# Altium PCB PCB.PcbDoc
Units mm, origin at the board's own origin, x right, y up, seen from the top; angles counter-clockwise.
Board outline 150 x 150 mm, 4 copper layers (Top Layer, Layer 1, Layer 2, Bottom Layer), stack 0.603 mm thick; 257 components, 34 nets, 4710 pads, 4 vias.
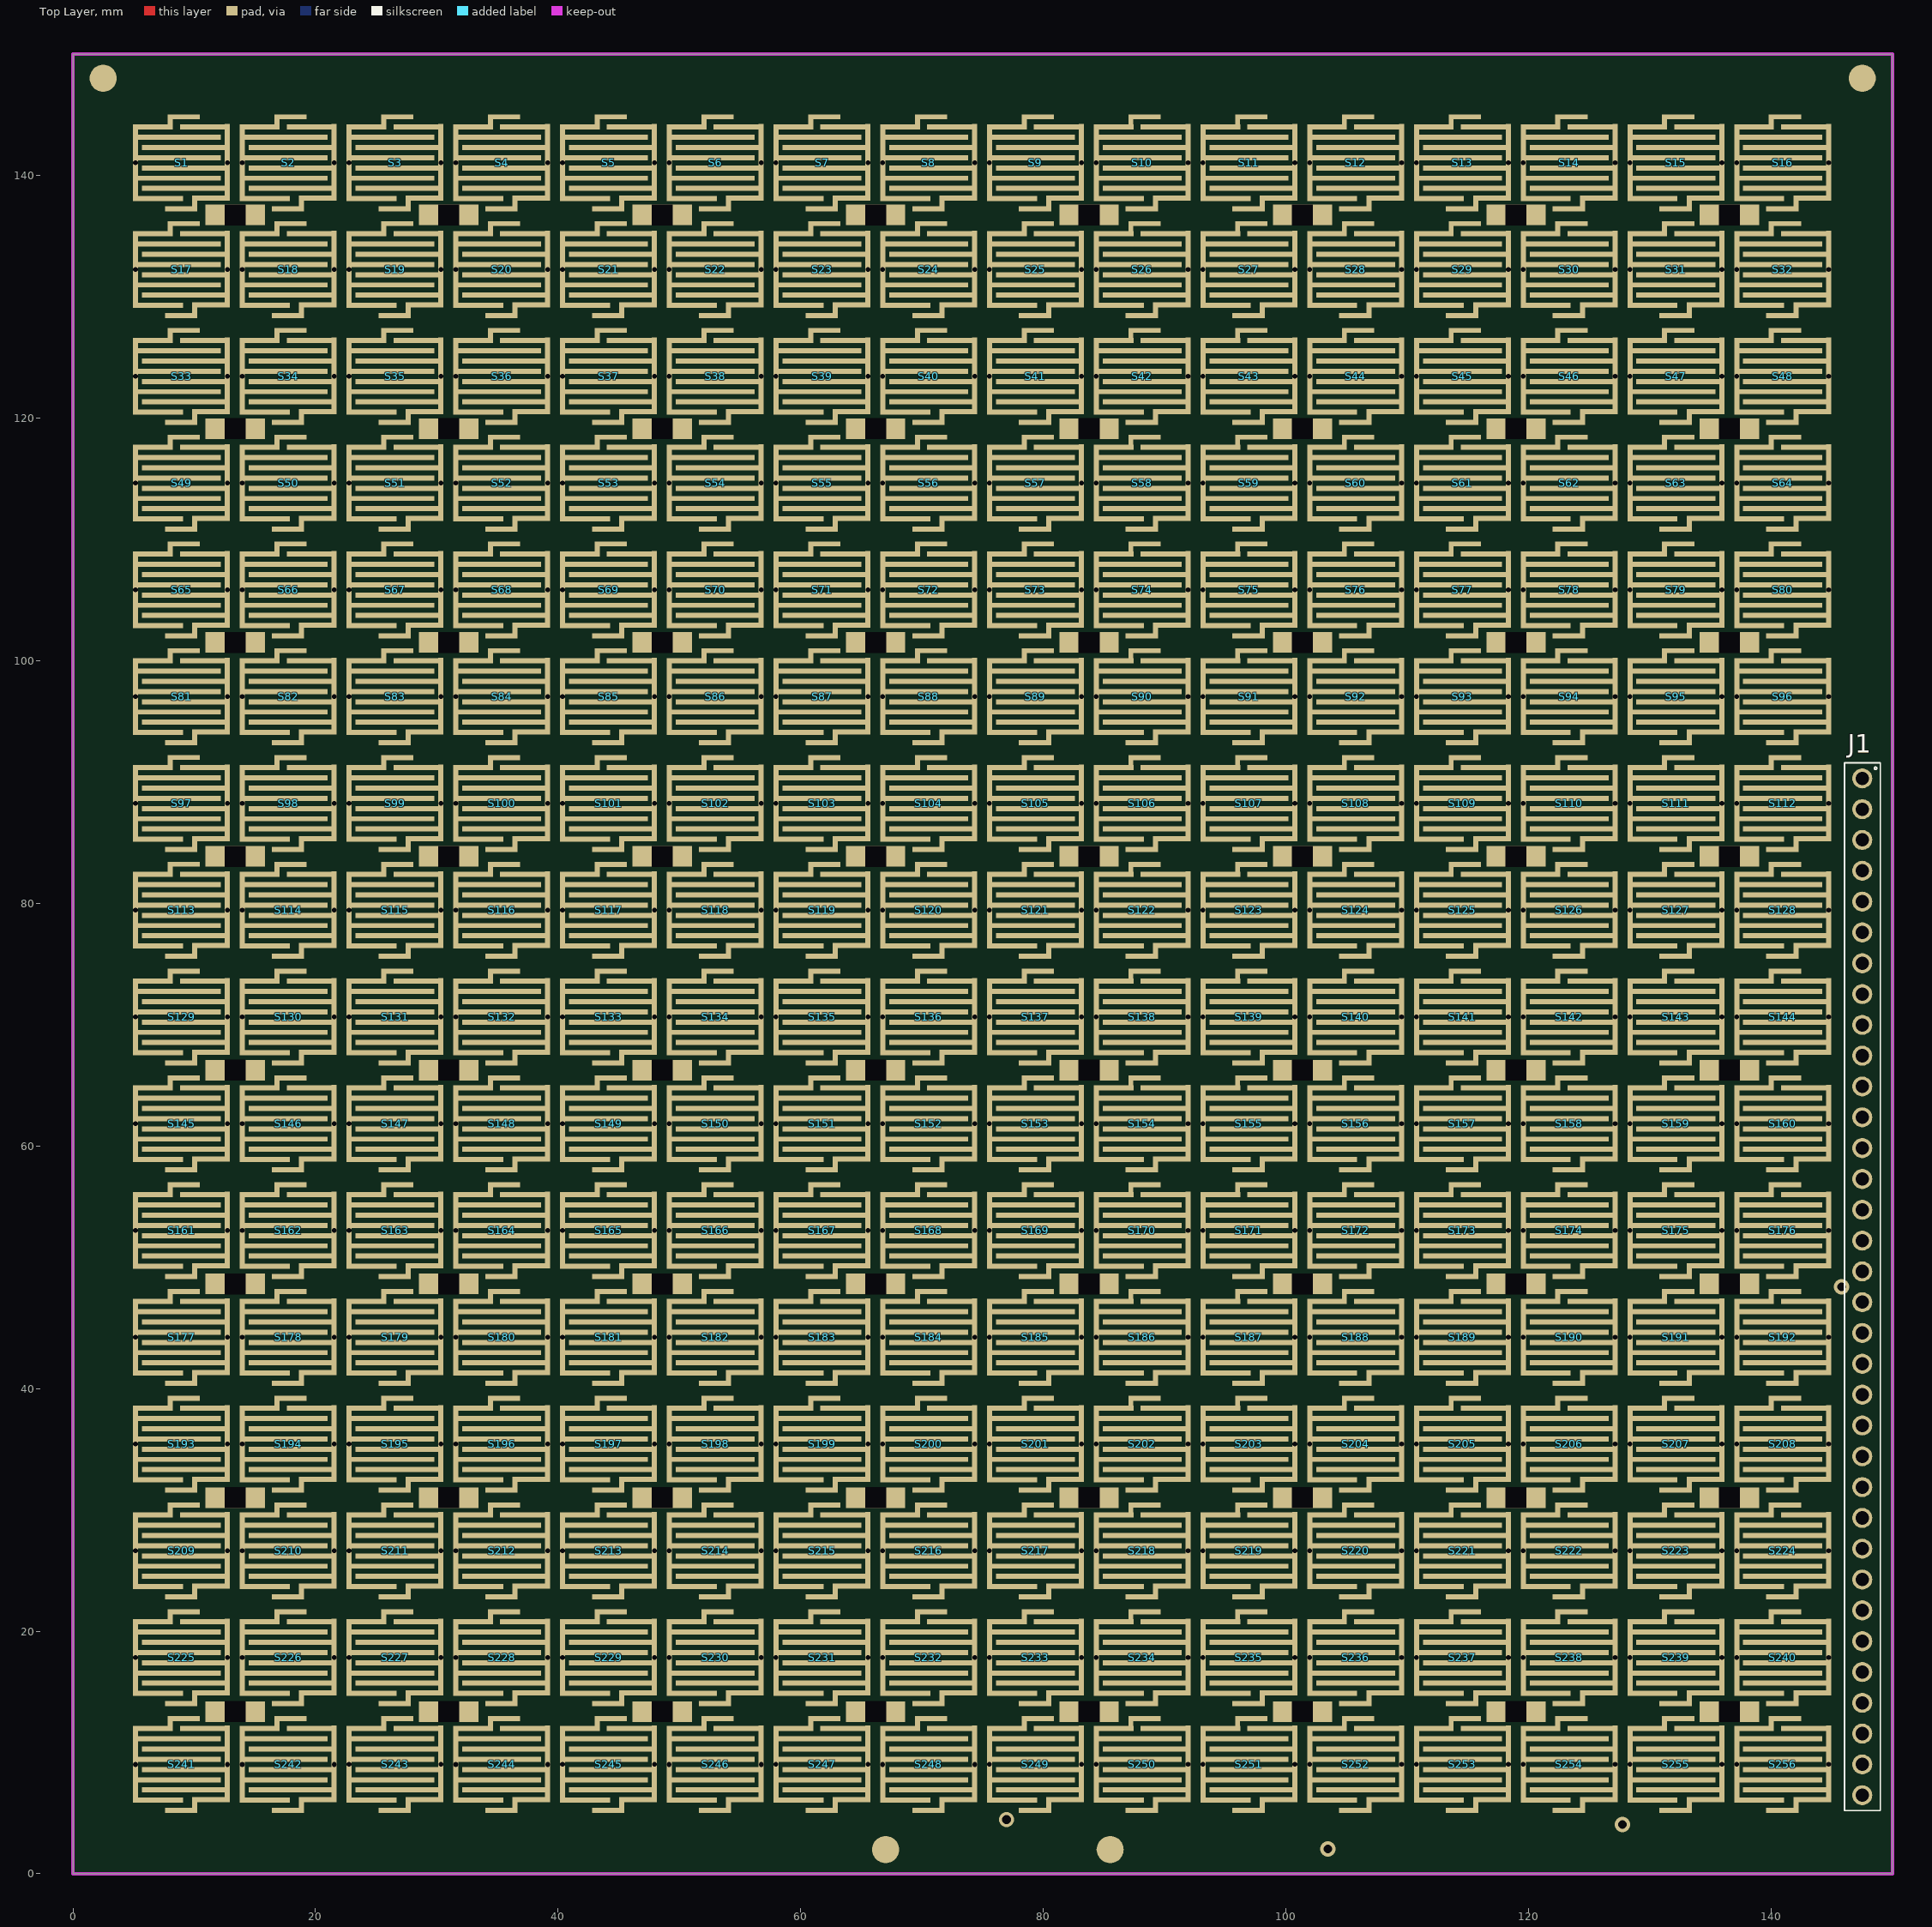
[diagram p0: Top Layer view]
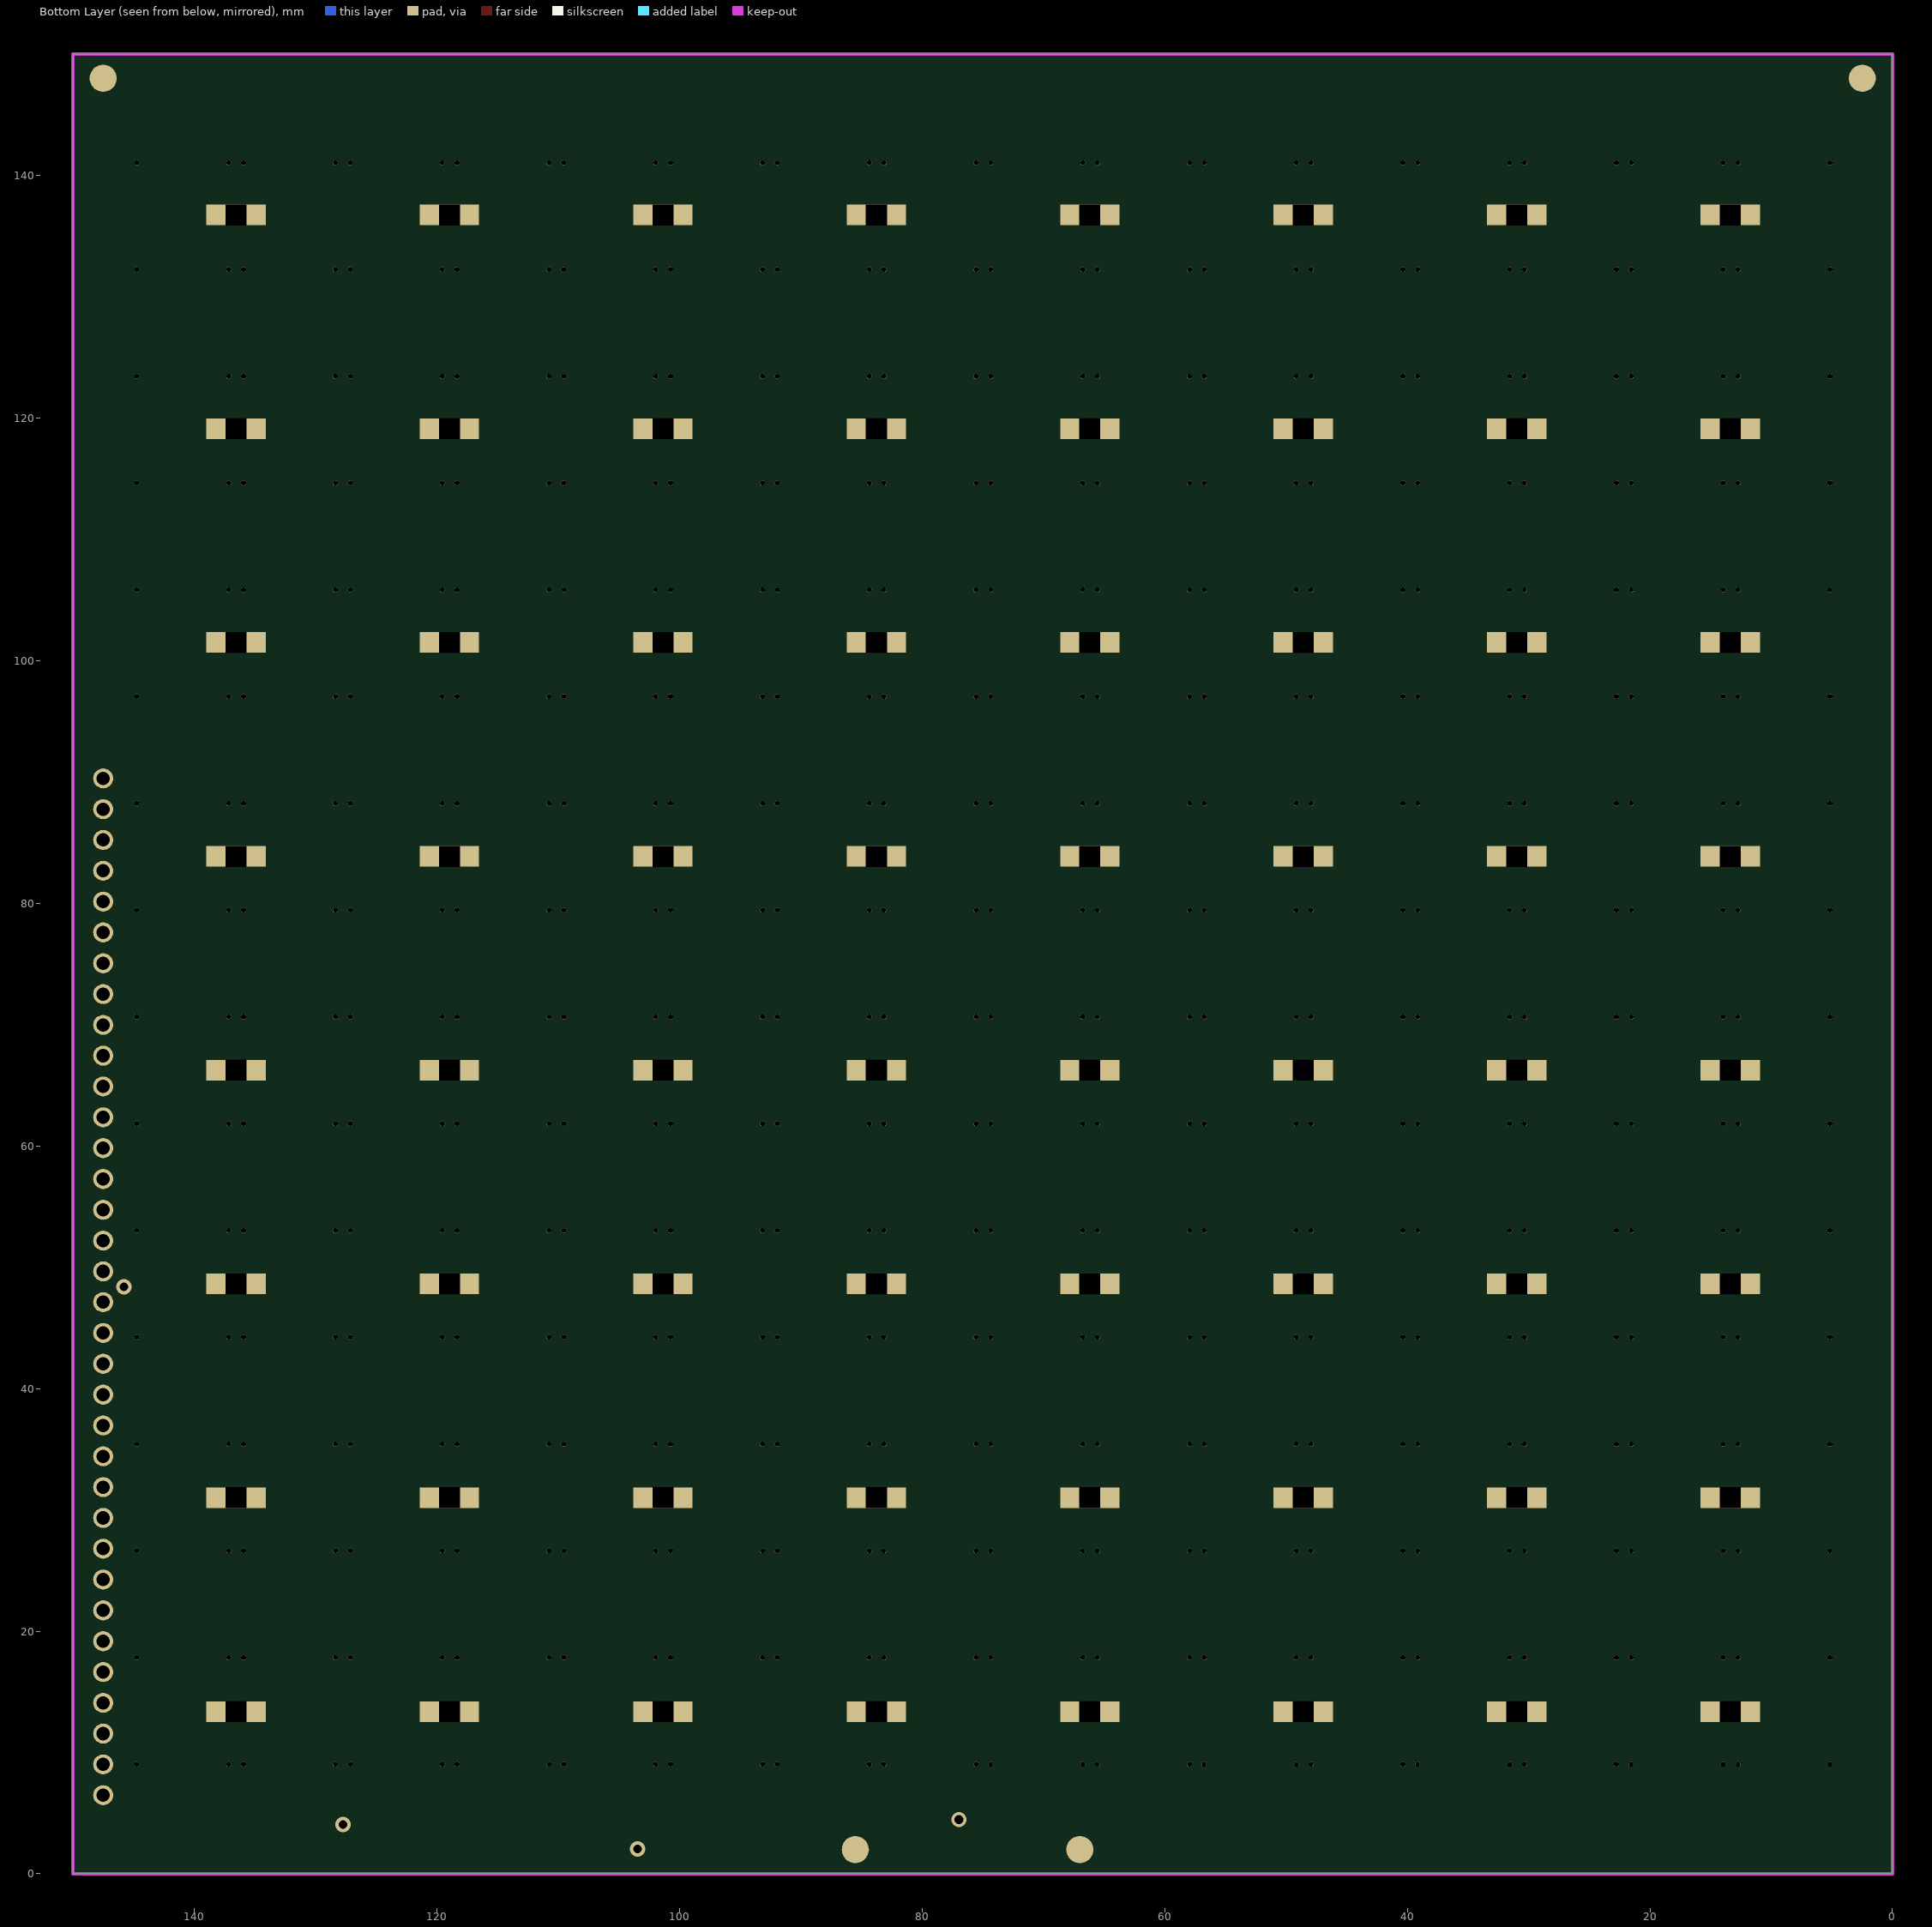
[diagram p1: Bottom Layer view, seen from below]
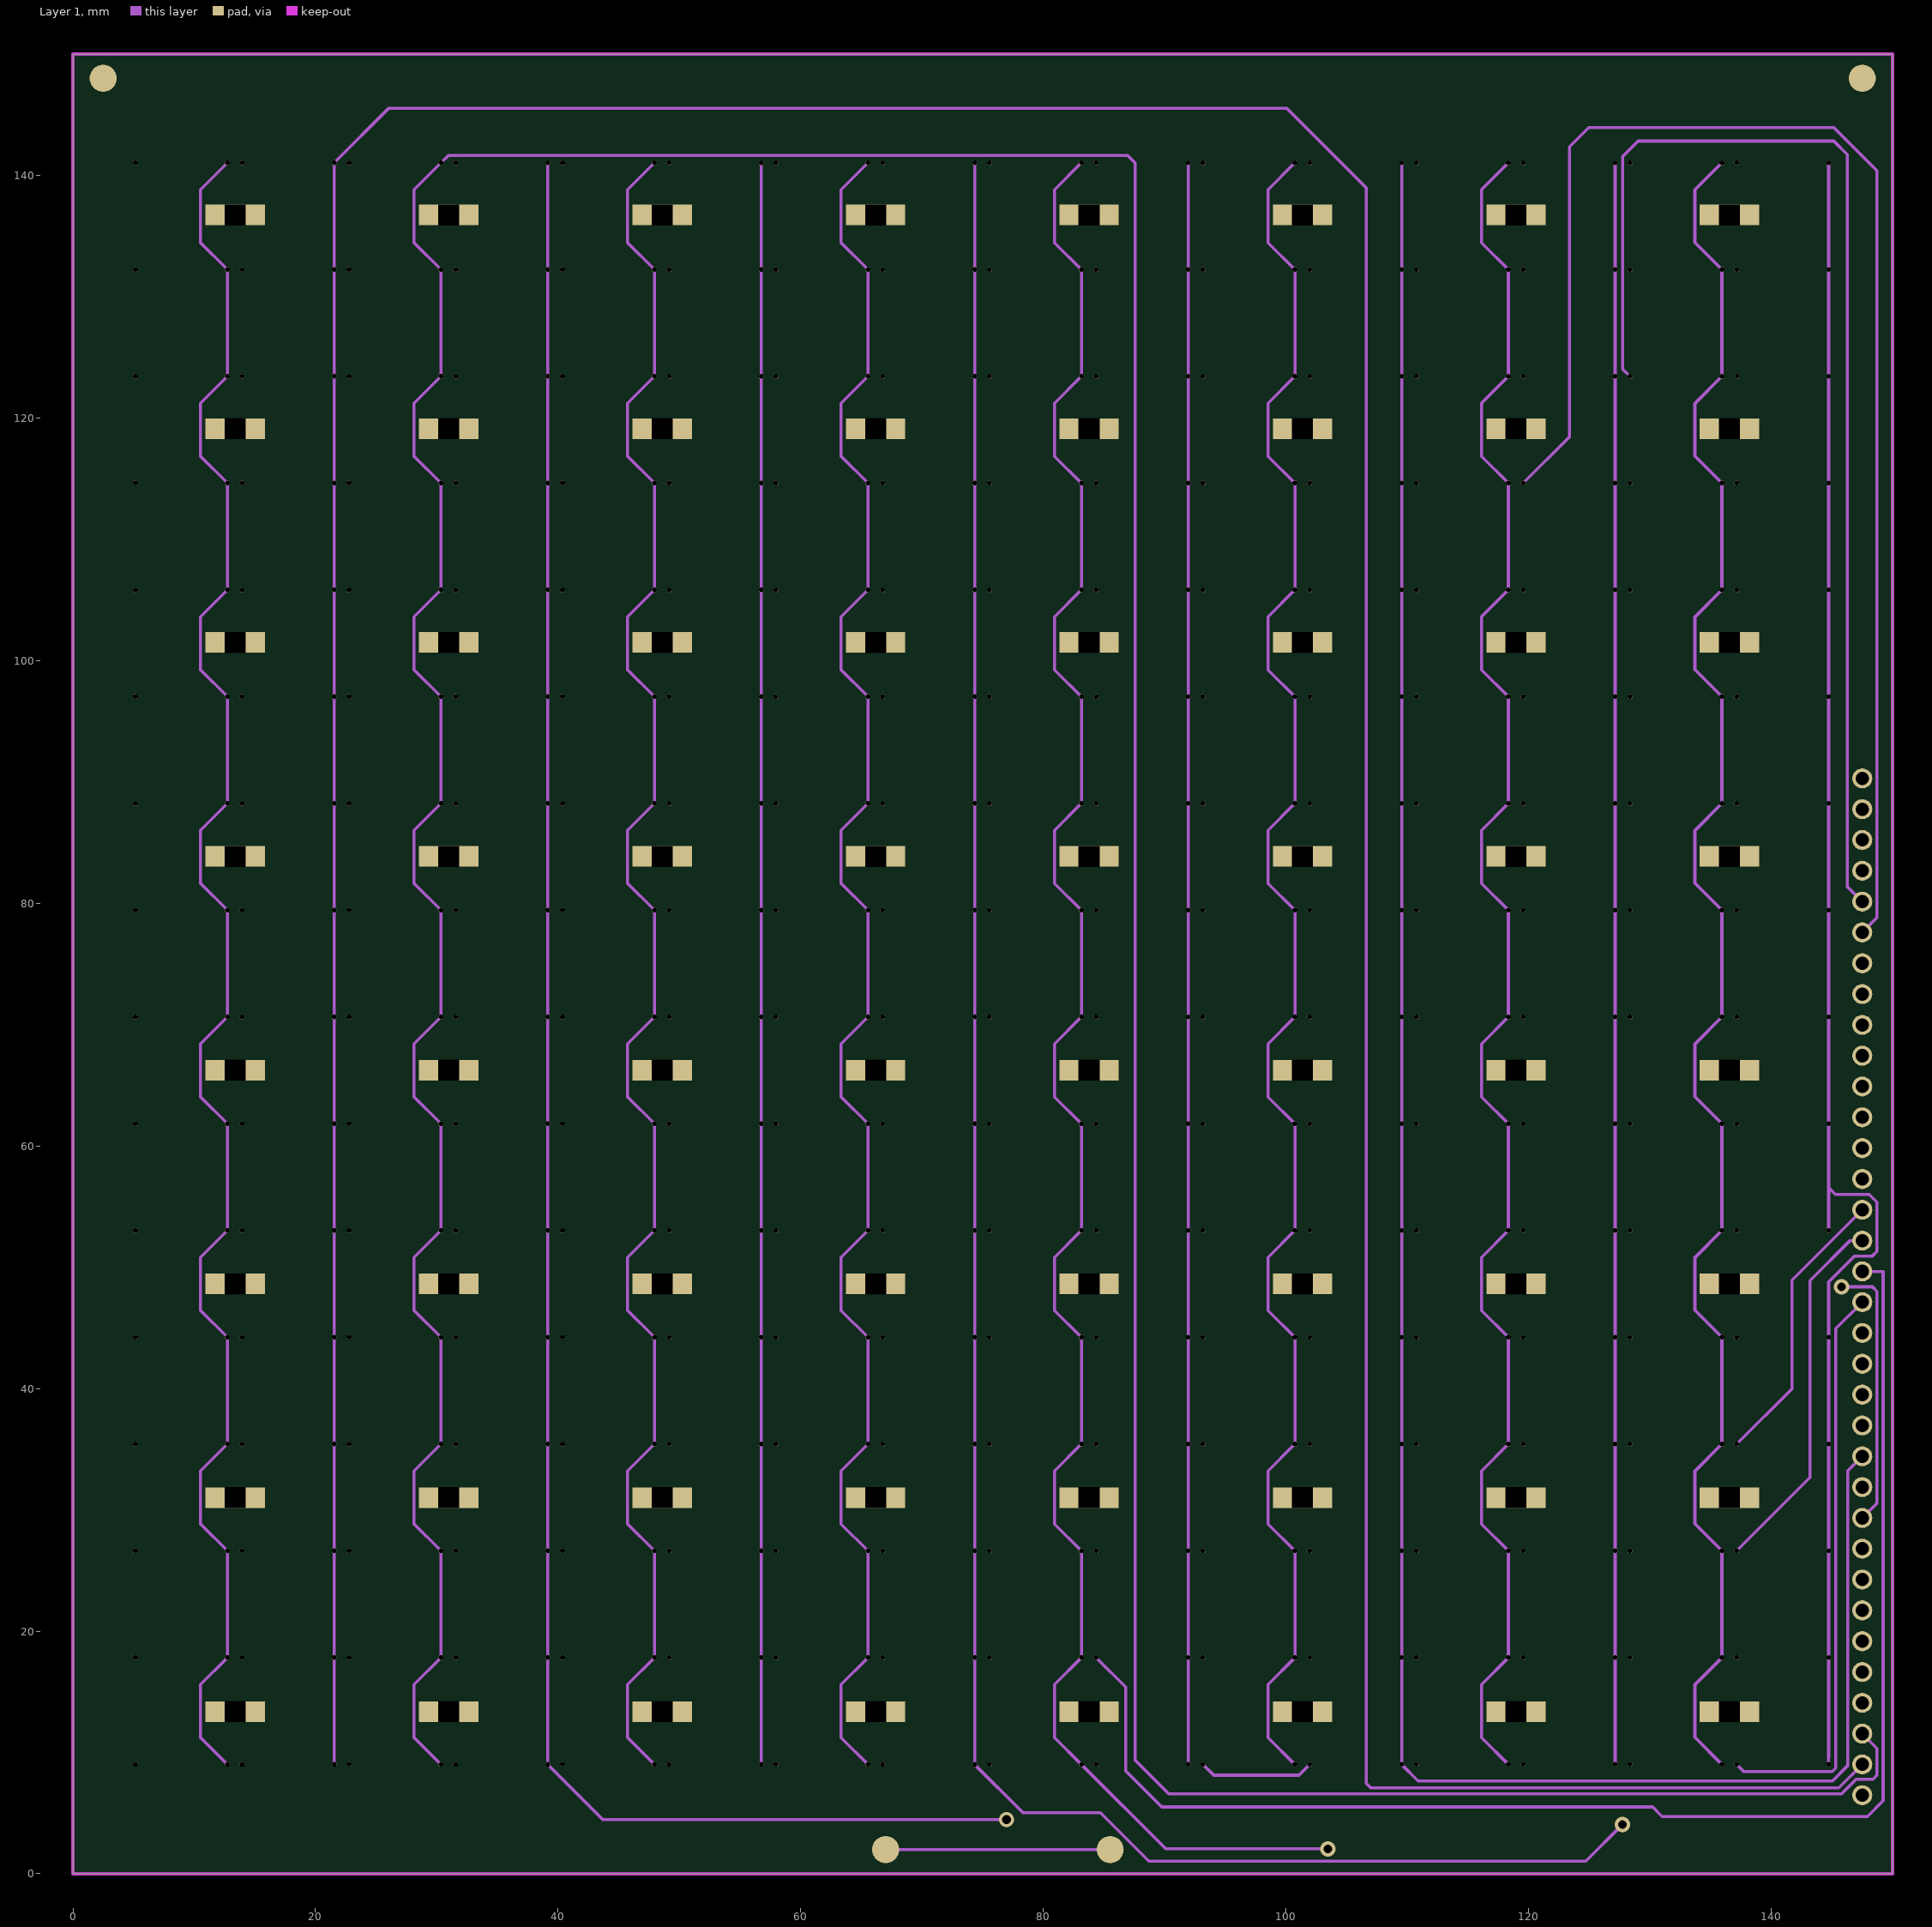
[diagram p2: Layer 1]
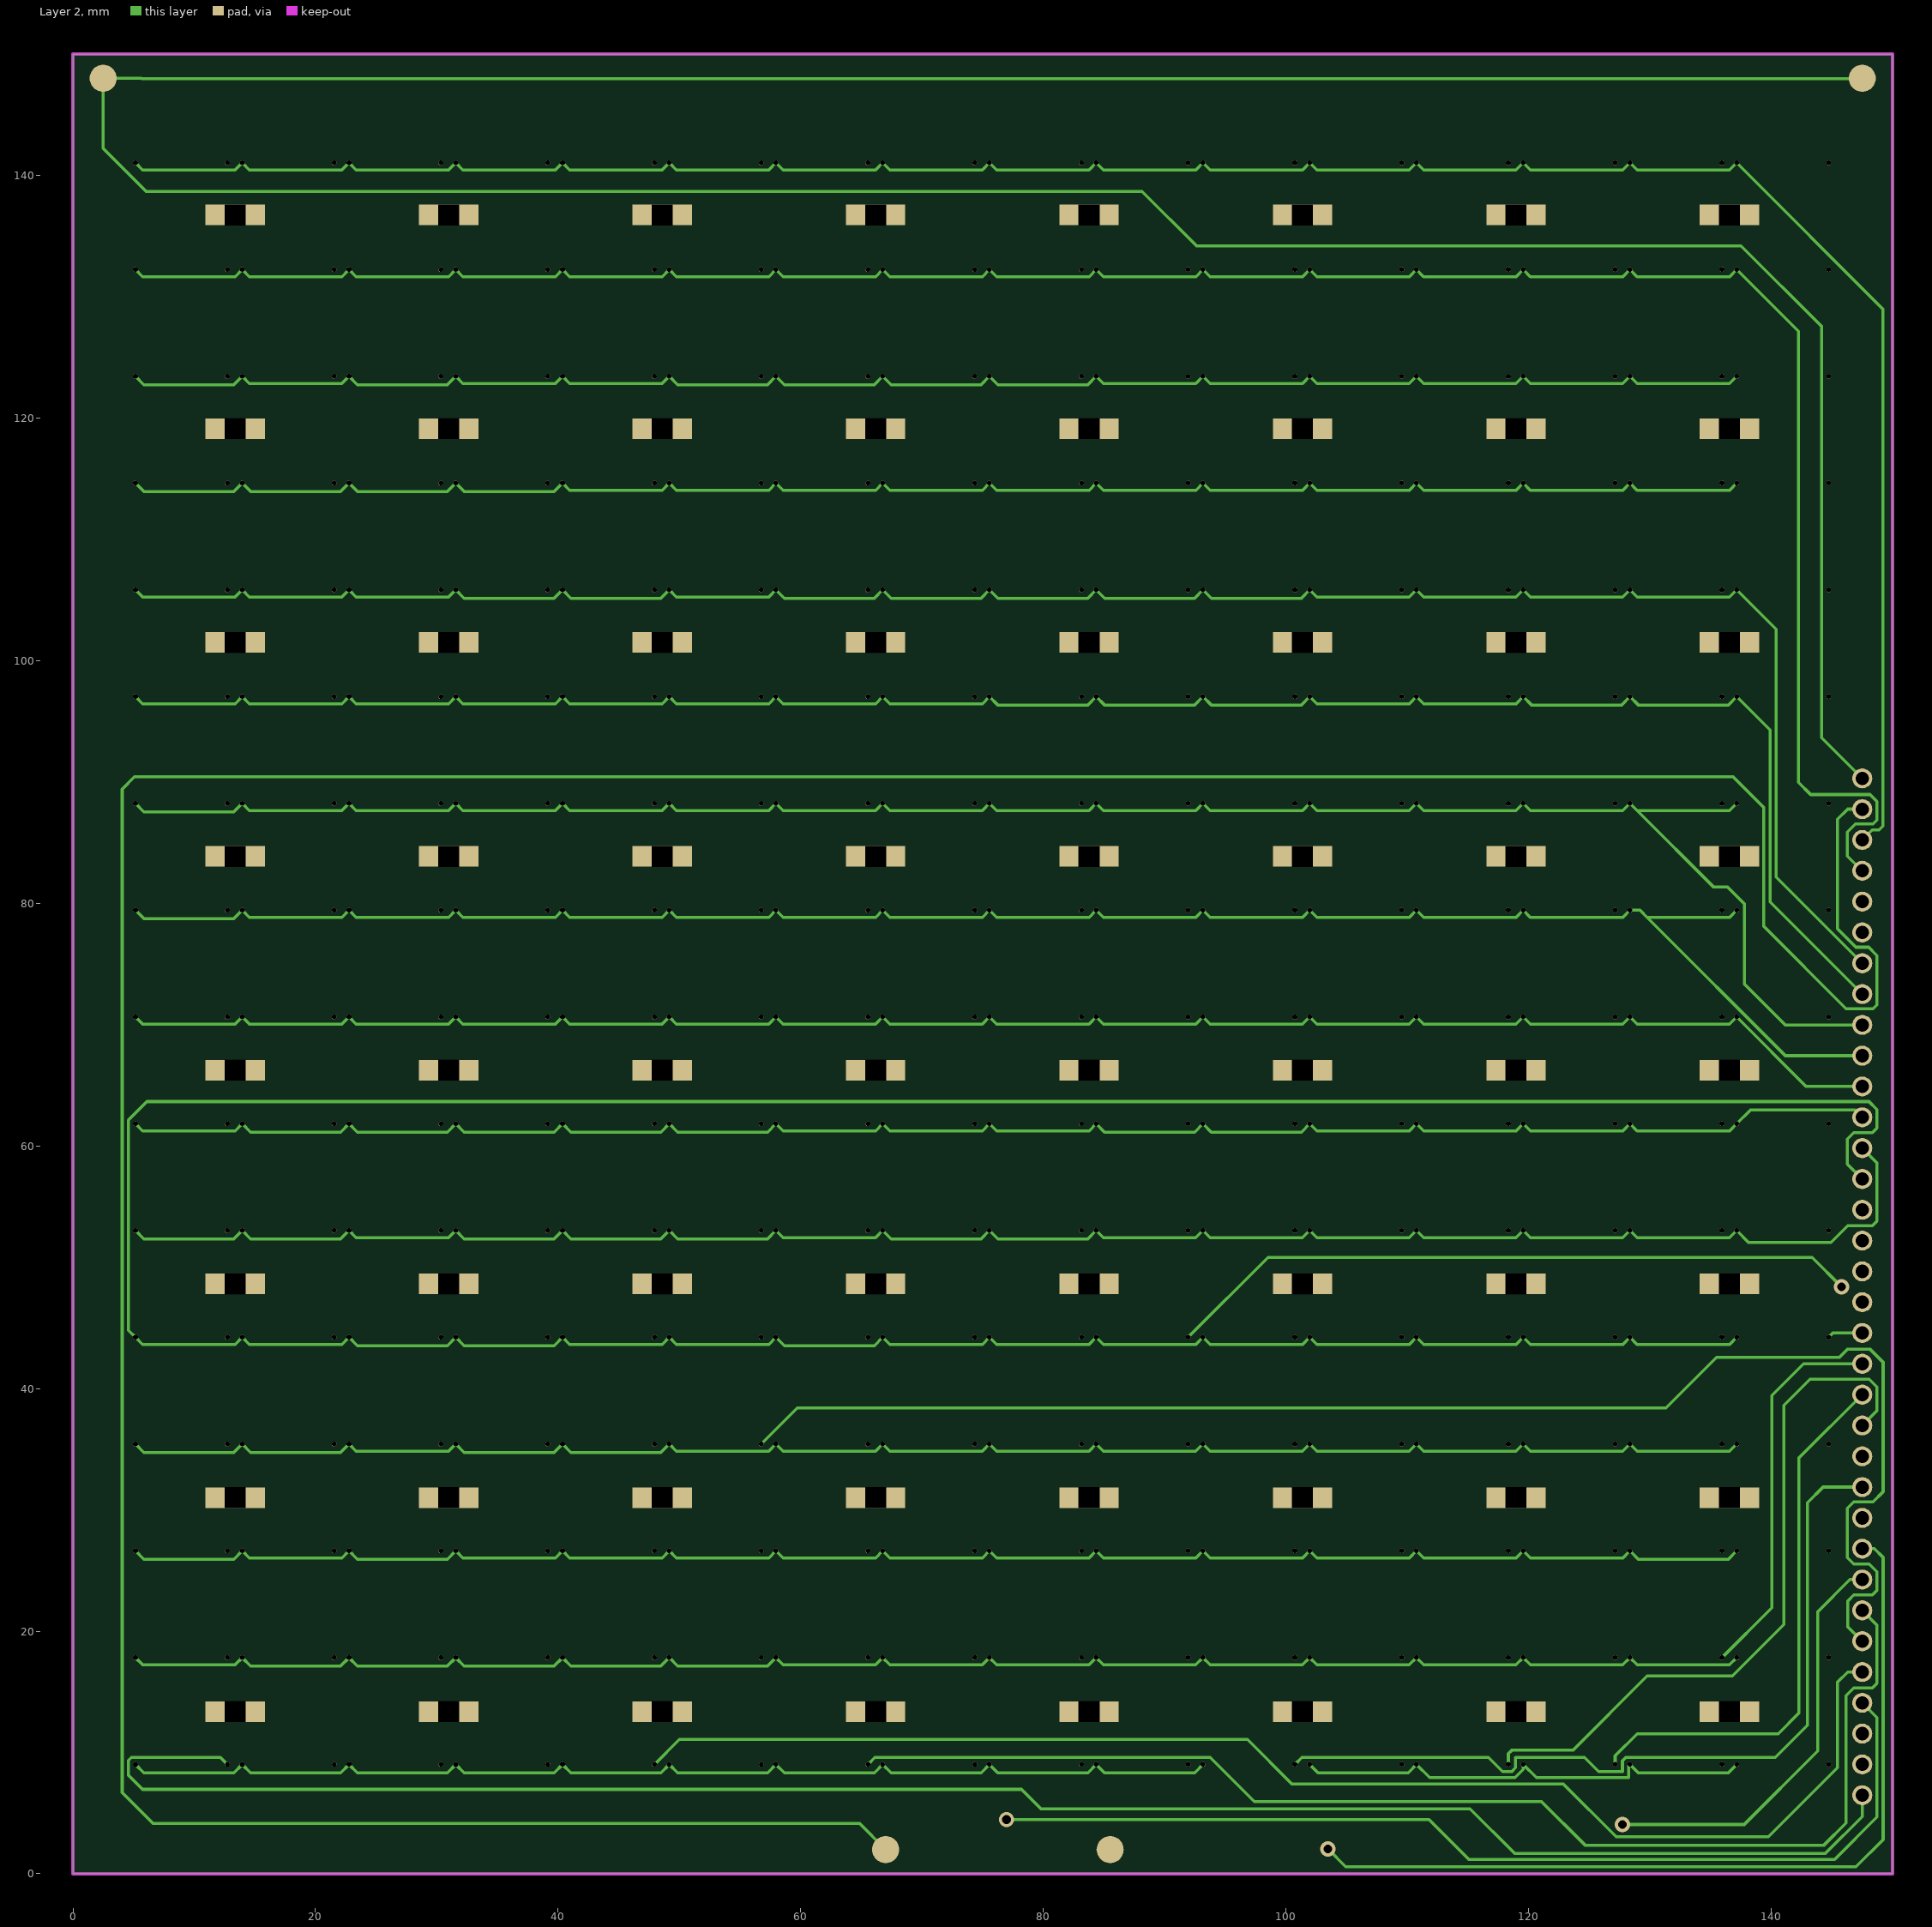
[diagram p3: Layer 2]

## Layer stack, top to bottom
Top Solder: solder mask 0.0102, Solder Resist, Dk 3.5
Top Layer: signal copper 0.0356
Dielectric 2: prepreg 0.0711, PP-006, Dk 4.1
Layer 1: signal copper 0.035
Dielectric 1: dielectric 0.32, FR-4, Dk 4.8
Layer 2: signal copper 0.035
Dielectric 3: prepreg 0.0711, PP-006, Dk 4.1
Bottom Layer: signal copper 0.0356
Bottom Solder: solder mask 0.0102, Solder Resist, Dk 3.5

## Board outline
0,0 0,150 150,150 150,0

## Design rules (kind name [scope] priority, off if disabled: settings)
Clearance [All] p1: gap=0.254 ignorepadtopadclearanceinfootprint=FALSE except(0: Arc-Hole Track-Hole SMDPad-Hole THPad-Hole Via-Hole Fill-Hole Poly-Hole Region-Hole Text-Hole)
PolygonConnect [All] p1: connectstyle=Relief reliefconductorwidth=0.254 reliefentries=4 polygonreliefangle="90 Angle" airgapwidth=0.254
RoutingVias [All] p1: holewidth=0.711 width=1.27 viastyle="Through Hole" minholewidth=0.711 minwidth=1.27 maxholewidth=0.711 maxwidth=1.27
SolderMaskExpansion [All] p1: expansion=0.102 istentingtop=FALSE
Width [All] p1: maxlimit=0.254 minlimit=0.254 preferedwidth=0.254
30 further rules are at their usual default settings.

## Components (designator, comment, footprint, x,y, rotation, side; value= is the part's Value field where it differs from the comment)
J1 "61303411021" 61303411021 147.5,48.387 r90 top
S1 "SENSOR" SENSOR 8.946,141.033 r180 top
S2 "SENSOR" SENSOR 17.746,141.033 r180 top
S3 "SENSOR" SENSOR 26.546,141.033 r180 top
S4 "SENSOR" SENSOR 35.346,141.033 r180 top
S5 "SENSOR" SENSOR 44.146,141.033 r180 top
S6 "SENSOR" SENSOR 52.946,141.033 r180 top
S7 "SENSOR" SENSOR 61.746,141.033 r180 top
S8 "SENSOR" SENSOR 70.546,141.033 r180 top
S9 "SENSOR" SENSOR 79.346,141.033 r180 top
S10 "SENSOR" SENSOR 88.146,141.033 r180 top
S11 "SENSOR" SENSOR 96.946,141.033 r180 top
S12 "SENSOR" SENSOR 105.746,141.033 r180 top
S13 "SENSOR" SENSOR 114.546,141.033 r180 top
S14 "SENSOR" SENSOR 123.346,141.033 r180 top
S15 "SENSOR" SENSOR 132.146,141.033 r180 top
S16 "SENSOR" SENSOR 140.946,141.033 r180 top
S17 "SENSOR" SENSOR 8.946,132.232 r180 top
S18 "SENSOR" SENSOR 17.746,132.232 r180 top
S19 "SENSOR" SENSOR 26.546,132.232 r180 top
S20 "SENSOR" SENSOR 35.346,132.232 r180 top
S21 "SENSOR" SENSOR 44.146,132.232 r180 top
S22 "SENSOR" SENSOR 52.946,132.232 r180 top
S23 "SENSOR" SENSOR 61.746,132.232 r180 top
S24 "SENSOR" SENSOR 70.546,132.232 r180 top
S25 "SENSOR" SENSOR 79.346,132.232 r180 top
S26 "SENSOR" SENSOR 88.146,132.232 r180 top
S27 "SENSOR" SENSOR 96.946,132.232 r180 top
S28 "SENSOR" SENSOR 105.746,132.232 r180 top
S29 "SENSOR" SENSOR 114.546,132.232 r180 top
S30 "SENSOR" SENSOR 123.346,132.232 r180 top
S31 "SENSOR" SENSOR 132.146,132.232 r180 top
S32 "SENSOR" SENSOR 140.946,132.232 r180 top
S33 "SENSOR" SENSOR 8.946,123.431 r180 top
S34 "SENSOR" SENSOR 17.746,123.431 r180 top
S35 "SENSOR" SENSOR 26.546,123.431 r180 top
S36 "SENSOR" SENSOR 35.346,123.431 r180 top
S37 "SENSOR" SENSOR 44.146,123.431 r180 top
S38 "SENSOR" SENSOR 52.946,123.431 r180 top
S39 "SENSOR" SENSOR 61.746,123.431 r180 top
S40 "SENSOR" SENSOR 70.546,123.431 r180 top
S41 "SENSOR" SENSOR 79.346,123.431 r180 top
S42 "SENSOR" SENSOR 88.146,123.431 r180 top
S43 "SENSOR" SENSOR 96.946,123.431 r180 top
S44 "SENSOR" SENSOR 105.746,123.431 r180 top
S45 "SENSOR" SENSOR 114.546,123.431 r180 top
S46 "SENSOR" SENSOR 123.346,123.431 r180 top
S47 "SENSOR" SENSOR 132.146,123.431 r180 top
S48 "SENSOR" SENSOR 140.946,123.431 r180 top
S49 "SENSOR" SENSOR 8.946,114.63 r180 top
S50 "SENSOR" SENSOR 17.746,114.63 r180 top
S51 "SENSOR" SENSOR 26.546,114.63 r180 top
S52 "SENSOR" SENSOR 35.346,114.63 r180 top
S53 "SENSOR" SENSOR 44.146,114.63 r180 top
S54 "SENSOR" SENSOR 52.946,114.63 r180 top
S55 "SENSOR" SENSOR 61.746,114.63 r180 top
S56 "SENSOR" SENSOR 70.546,114.63 r180 top
S57 "SENSOR" SENSOR 79.346,114.63 r180 top
S58 "SENSOR" SENSOR 88.146,114.63 r180 top
S59 "SENSOR" SENSOR 96.946,114.63 r180 top
S60 "SENSOR" SENSOR 105.746,114.63 r180 top
S61 "SENSOR" SENSOR 114.546,114.63 r180 top
S62 "SENSOR" SENSOR 123.346,114.63 r180 top
S63 "SENSOR" SENSOR 132.146,114.63 r180 top
S64 "SENSOR" SENSOR 140.946,114.63 r180 top
S65 "SENSOR" SENSOR 8.946,105.829 r180 top
S66 "SENSOR" SENSOR 17.746,105.829 r180 top
S67 "SENSOR" SENSOR 26.546,105.829 r180 top
S68 "SENSOR" SENSOR 35.346,105.829 r180 top
S69 "SENSOR" SENSOR 44.146,105.829 r180 top
S70 "SENSOR" SENSOR 52.946,105.829 r180 top
S71 "SENSOR" SENSOR 61.746,105.829 r180 top
S72 "SENSOR" SENSOR 70.546,105.829 r180 top
S73 "SENSOR" SENSOR 79.346,105.829 r180 top
S74 "SENSOR" SENSOR 88.146,105.829 r180 top
S75 "SENSOR" SENSOR 96.946,105.829 r180 top
S76 "SENSOR" SENSOR 105.746,105.829 r180 top
S77 "SENSOR" SENSOR 114.546,105.829 r180 top
S78 "SENSOR" SENSOR 123.346,105.829 r180 top
S79 "SENSOR" SENSOR 132.146,105.829 r180 top
S80 "SENSOR" SENSOR 140.946,105.829 r180 top
S81 "SENSOR" SENSOR 8.946,97.028 r180 top
S82 "SENSOR" SENSOR 17.746,97.028 r180 top
S83 "SENSOR" SENSOR 26.546,97.028 r180 top
S84 "SENSOR" SENSOR 35.346,97.028 r180 top
S85 "SENSOR" SENSOR 44.146,97.028 r180 top
S86 "SENSOR" SENSOR 52.946,97.028 r180 top
S87 "SENSOR" SENSOR 61.746,97.028 r180 top
S88 "SENSOR" SENSOR 70.546,97.028 r180 top
S89 "SENSOR" SENSOR 79.346,97.028 r180 top
S90 "SENSOR" SENSOR 88.146,97.028 r180 top
S91 "SENSOR" SENSOR 96.946,97.028 r180 top
S92 "SENSOR" SENSOR 105.746,97.028 r180 top
S93 "SENSOR" SENSOR 114.546,97.028 r180 top
S94 "SENSOR" SENSOR 123.346,97.028 r180 top
S95 "SENSOR" SENSOR 132.146,97.028 r180 top
S96 "SENSOR" SENSOR 140.946,97.028 r180 top
S97 "SENSOR" SENSOR 8.946,88.227 r180 top
S98 "SENSOR" SENSOR 17.746,88.227 r180 top
S99 "SENSOR" SENSOR 26.546,88.227 r180 top
S100 "SENSOR" SENSOR 35.346,88.227 r180 top
S101 "SENSOR" SENSOR 44.146,88.227 r180 top
S102 "SENSOR" SENSOR 52.946,88.227 r180 top
S103 "SENSOR" SENSOR 61.746,88.227 r180 top
S104 "SENSOR" SENSOR 70.546,88.227 r180 top
S105 "SENSOR" SENSOR 79.346,88.227 r180 top
S106 "SENSOR" SENSOR 88.146,88.227 r180 top
S107 "SENSOR" SENSOR 96.946,88.227 r180 top
S108 "SENSOR" SENSOR 105.746,88.227 r180 top
S109 "SENSOR" SENSOR 114.546,88.227 r180 top
S110 "SENSOR" SENSOR 123.346,88.227 r180 top
S111 "SENSOR" SENSOR 132.146,88.227 r180 top
S112 "SENSOR" SENSOR 140.946,88.227 r180 top
S113 "SENSOR" SENSOR 8.946,79.426 r180 top
S114 "SENSOR" SENSOR 17.746,79.426 r180 top
S115 "SENSOR" SENSOR 26.546,79.426 r180 top
S116 "SENSOR" SENSOR 35.346,79.426 r180 top
S117 "SENSOR" SENSOR 44.146,79.426 r180 top
S118 "SENSOR" SENSOR 52.946,79.426 r180 top
S119 "SENSOR" SENSOR 61.746,79.426 r180 top
S120 "SENSOR" SENSOR 70.546,79.426 r180 top
S121 "SENSOR" SENSOR 79.346,79.426 r180 top
S122 "SENSOR" SENSOR 88.146,79.426 r180 top
S123 "SENSOR" SENSOR 96.946,79.426 r180 top
S124 "SENSOR" SENSOR 105.746,79.426 r180 top
S125 "SENSOR" SENSOR 114.546,79.426 r180 top
S126 "SENSOR" SENSOR 123.346,79.426 r180 top
S127 "SENSOR" SENSOR 132.146,79.426 r180 top
S128 "SENSOR" SENSOR 140.946,79.426 r180 top
S129 "SENSOR" SENSOR 8.946,70.625 r180 top
S130 "SENSOR" SENSOR 17.746,70.625 r180 top
S131 "SENSOR" SENSOR 26.546,70.625 r180 top
S132 "SENSOR" SENSOR 35.346,70.625 r180 top
S133 "SENSOR" SENSOR 44.146,70.625 r180 top
S134 "SENSOR" SENSOR 52.946,70.625 r180 top
S135 "SENSOR" SENSOR 61.746,70.625 r180 top
S136 "SENSOR" SENSOR 70.546,70.625 r180 top
S137 "SENSOR" SENSOR 79.346,70.625 r180 top
S138 "SENSOR" SENSOR 88.146,70.625 r180 top
S139 "SENSOR" SENSOR 96.946,70.625 r180 top
S140 "SENSOR" SENSOR 105.746,70.625 r180 top
S141 "SENSOR" SENSOR 114.546,70.625 r180 top
S142 "SENSOR" SENSOR 123.346,70.625 r180 top
S143 "SENSOR" SENSOR 132.146,70.625 r180 top
S144 "SENSOR" SENSOR 140.946,70.625 r180 top
S145 "SENSOR" SENSOR 8.946,61.824 r180 top
S146 "SENSOR" SENSOR 17.746,61.824 r180 top
S147 "SENSOR" SENSOR 26.546,61.824 r180 top
S148 "SENSOR" SENSOR 35.346,61.824 r180 top
S149 "SENSOR" SENSOR 44.146,61.824 r180 top
S150 "SENSOR" SENSOR 52.946,61.824 r180 top
S151 "SENSOR" SENSOR 61.746,61.824 r180 top
S152 "SENSOR" SENSOR 70.546,61.824 r180 top
S153 "SENSOR" SENSOR 79.346,61.824 r180 top
S154 "SENSOR" SENSOR 88.146,61.824 r180 top
S155 "SENSOR" SENSOR 96.946,61.824 r180 top
S156 "SENSOR" SENSOR 105.746,61.824 r180 top
S157 "SENSOR" SENSOR 114.546,61.824 r180 top
S158 "SENSOR" SENSOR 123.346,61.824 r180 top
S159 "SENSOR" SENSOR 132.146,61.824 r180 top
S160 "SENSOR" SENSOR 140.946,61.824 r180 top
S161 "SENSOR" SENSOR 8.946,53.023 r180 top
S162 "SENSOR" SENSOR 17.746,53.023 r180 top
S163 "SENSOR" SENSOR 26.546,53.023 r180 top
S164 "SENSOR" SENSOR 35.346,53.023 r180 top
S165 "SENSOR" SENSOR 44.146,53.023 r180 top
S166 "SENSOR" SENSOR 52.946,53.023 r180 top
S167 "SENSOR" SENSOR 61.746,53.023 r180 top
S168 "SENSOR" SENSOR 70.546,53.023 r180 top
S169 "SENSOR" SENSOR 79.346,53.023 r180 top
S170 "SENSOR" SENSOR 88.146,53.023 r180 top
S171 "SENSOR" SENSOR 96.946,53.023 r180 top
S172 "SENSOR" SENSOR 105.746,53.023 r180 top
S173 "SENSOR" SENSOR 114.546,53.023 r180 top
S174 "SENSOR" SENSOR 123.346,53.023 r180 top
S175 "SENSOR" SENSOR 132.146,53.023 r180 top
S176 "SENSOR" SENSOR 140.946,53.023 r180 top
S177 "SENSOR" SENSOR 8.946,44.222 r180 top
S178 "SENSOR" SENSOR 17.746,44.222 r180 top
S179 "SENSOR" SENSOR 26.546,44.222 r180 top
S180 "SENSOR" SENSOR 35.346,44.222 r180 top
S181 "SENSOR" SENSOR 44.146,44.222 r180 top
S182 "SENSOR" SENSOR 52.946,44.222 r180 top
S183 "SENSOR" SENSOR 61.746,44.222 r180 top
S184 "SENSOR" SENSOR 70.546,44.222 r180 top
S185 "SENSOR" SENSOR 79.346,44.222 r180 top
S186 "SENSOR" SENSOR 88.146,44.222 r180 top
S187 "SENSOR" SENSOR 96.946,44.222 r180 top
S188 "SENSOR" SENSOR 105.746,44.222 r180 top
S189 "SENSOR" SENSOR 114.546,44.222 r180 top
S190 "SENSOR" SENSOR 123.346,44.222 r180 top
S191 "SENSOR" SENSOR 132.146,44.222 r180 top
S192 "SENSOR" SENSOR 140.946,44.222 r180 top
S193 "SENSOR" SENSOR 8.946,35.421 r180 top
S194 "SENSOR" SENSOR 17.746,35.421 r180 top
S195 "SENSOR" SENSOR 26.546,35.421 r180 top
S196 "SENSOR" SENSOR 35.346,35.421 r180 top
S197 "SENSOR" SENSOR 44.146,35.421 r180 top
S198 "SENSOR" SENSOR 52.946,35.421 r180 top
S199 "SENSOR" SENSOR 61.746,35.421 r180 top
S200 "SENSOR" SENSOR 70.546,35.421 r180 top
S201 "SENSOR" SENSOR 79.346,35.421 r180 top
S202 "SENSOR" SENSOR 88.146,35.421 r180 top
S203 "SENSOR" SENSOR 96.946,35.421 r180 top
S204 "SENSOR" SENSOR 105.746,35.421 r180 top
S205 "SENSOR" SENSOR 114.546,35.421 r180 top
S206 "SENSOR" SENSOR 123.346,35.421 r180 top
S207 "SENSOR" SENSOR 132.146,35.421 r180 top
S208 "SENSOR" SENSOR 140.946,35.421 r180 top
S209 "SENSOR" SENSOR 8.946,26.62 r180 top
S210 "SENSOR" SENSOR 17.746,26.62 r180 top
S211 "SENSOR" SENSOR 26.546,26.62 r180 top
S212 "SENSOR" SENSOR 35.346,26.62 r180 top
S213 "SENSOR" SENSOR 44.146,26.62 r180 top
S214 "SENSOR" SENSOR 52.946,26.62 r180 top
S215 "SENSOR" SENSOR 61.746,26.62 r180 top
S216 "SENSOR" SENSOR 70.546,26.62 r180 top
S217 "SENSOR" SENSOR 79.346,26.62 r180 top
S218 "SENSOR" SENSOR 88.146,26.62 r180 top
S219 "SENSOR" SENSOR 96.946,26.62 r180 top
S220 "SENSOR" SENSOR 105.746,26.62 r180 top
S221 "SENSOR" SENSOR 114.546,26.62 r180 top
S222 "SENSOR" SENSOR 123.346,26.62 r180 top
S223 "SENSOR" SENSOR 132.146,26.62 r180 top
S224 "SENSOR" SENSOR 140.946,26.62 r180 top
S225 "SENSOR" SENSOR 8.946,17.819 r180 top
S226 "SENSOR" SENSOR 17.746,17.819 r180 top
S227 "SENSOR" SENSOR 26.546,17.819 r180 top
S228 "SENSOR" SENSOR 35.346,17.819 r180 top
S229 "SENSOR" SENSOR 44.146,17.819 r180 top
S230 "SENSOR" SENSOR 52.946,17.819 r180 top
S231 "SENSOR" SENSOR 61.746,17.819 r180 top
S232 "SENSOR" SENSOR 70.546,17.819 r180 top
S233 "SENSOR" SENSOR 79.346,17.819 r180 top
S234 "SENSOR" SENSOR 88.146,17.819 r180 top
S235 "SENSOR" SENSOR 96.946,17.819 r180 top
S236 "SENSOR" SENSOR 105.746,17.819 r180 top
S237 "SENSOR" SENSOR 114.546,17.819 r180 top
S238 "SENSOR" SENSOR 123.346,17.819 r180 top
S239 "SENSOR" SENSOR 132.146,17.819 r180 top
S240 "SENSOR" SENSOR 140.946,17.819 r180 top
S241 "SENSOR" SENSOR 8.946,9.017 r180 top
S242 "SENSOR" SENSOR 17.746,9.017 r180 top
S243 "SENSOR" SENSOR 26.546,9.018 r180 top
S244 "SENSOR" SENSOR 35.346,9.017 r180 top
S245 "SENSOR" SENSOR 44.146,9.017 r180 top
S246 "SENSOR" SENSOR 52.946,9.017 r180 top
S247 "SENSOR" SENSOR 61.746,9.017 r180 top
S248 "SENSOR" SENSOR 70.546,9.017 r180 top
S249 "SENSOR" SENSOR 79.346,9.018 r180 top
S250 "SENSOR" SENSOR 88.146,9.017 r180 top
S251 "SENSOR" SENSOR 96.946,9.017 r180 top
S252 "SENSOR" SENSOR 105.746,9.018 r180 top
S253 "SENSOR" SENSOR 114.546,9.018 r180 top
S254 "SENSOR" SENSOR 123.346,9.018 r180 top
S255 "SENSOR" SENSOR 132.146,9.017 r180 top
S256 "SENSOR" SENSOR 140.946,9.017 r180 top

## Footprints (in the part's own frame and the unit in brackets; to place one, negate y for a bottom-side part, rotate by r counter-clockwise, add the part's x,y. Pads: shape width x height; smd on the part's side, far side on the other; paste and mask are expansions set on the pad)
61303411021 [mm]
  round 1.65 hole 1.1: 1(41.91,0) 2(39.37,0) 3(36.83,0) 4(34.29,0) 5(31.75,0) 6(29.21,0) 7(26.67,0) 8(24.13,0) 9(21.59,0) 10(19.05,0) 11(16.51,0) 12(13.97,0) 13(11.43,0) 14(8.89,0) 15(6.35,0) 16(3.81,0) 17(1.27,0) 18(-1.27,0) 19(-3.81,0) 20(-6.35,0) 21(-8.89,0) 22(-11.43,0) 23(-13.97,0) 24(-16.51,0) 25(-19.05,0) 26(-21.59,0) 27(-24.13,0) 28(-26.67,0) 29(-29.21,0) 30(-31.75,0) 31(-34.29,0) 32(-36.83,0) 33(-39.37,0) 34(-41.91,0)
  silkscreen extent -43.18,-1.5 43.18,1.45
SENSOR [mm]
  round 0.4 hole 0.4: 1(3.789,0) 2(-3.789,0)
  rect 0.421x6.3 smd mask+0: ""(-3.789,-0.045)
  rect 2.833x0.421 smd mask+0: ""(-2.306,2.894)
  rect 3.81x0.421 smd mask+0: ""(-1.778,-2.948) ""(1.778,2.948)
  rect 0.421x0.889 smd mask+0: ""(-1.099,3.492) ""(0.933,-3.366)
  rect 6.947x0.421 smd mask+0: ""(-0.21,2.106) ""(-0.21,0.421) ""(-0.21,-1.263) ""(0.21,1.263) ""(0.21,-0.421) ""(0.21,-2.106)
  rect 2.667x0.421 smd mask+0: ""(-0.19,-3.79)
  rect 2.677x0.421 smd mask+0: ""(0.021,3.796)
  rect 3.001x0.421 smd mask+0: ""(2.222,-2.948)
  rect 0.421x6.33 smd mask+0: ""(3.789,0)

## Part data
J1: "<b> WR-PHD 2.54mm Angled Pin Header, 34 Pins/<b>=>Con_BTB_PHD_2.54_1_THT_61303411021 <br><a href=\"http://katalog.we-online.de/media/images/eican/Con_BTB_PHD_2.54_1_THT_61303211021_pf2.jpg\" title=\"Enlarge picture\"> <img src=\"http://katalog.we-online.de/media/thumbs2/eican/thb_Con_BTB_PHD_2.54_1_THT_61303211021_pf2.jpg\" width=\"320\"></a><p> Details see: <a href=\"http://katalog.we-online.de/en/em/613_0xx_110_21\">http://katalog.we-online.de/en/em/613_0xx_110_21</a><p> Created 2014-05-29, Karrer Zheng<br> 2014 (C) WÃ¼rth Elektronik", Package=None, Availability=Unavailable, MF="{'manufacturer': u'W\xfcrth Elektronik'}", MP=61303411021, Price=None

## Free pads (board coordinates)
  rect 4.9x1.7 hole 1.7 square mask+0: 1(13.372,13.375) 1(13.372,30.999) 1(13.372,48.622) 1(13.372,66.246) 1(13.372,83.869) 1(13.372,101.493) 1(13.372,119.116) 1(13.372,136.74) 1(30.971,13.375) 1(30.971,30.999) 1(30.971,48.622) 1(30.971,66.246) 1(30.971,83.869) 1(30.971,101.493) 1(30.971,119.116) 1(30.971,136.74) 1(48.569,13.375) 1(48.569,30.999) 1(48.569,48.622) 1(48.569,66.246) 1(48.569,83.869) 1(48.569,101.493) 1(48.569,119.116) 1(48.569,136.74) 1(66.168,13.375) 1(66.168,30.999) 1(66.168,48.622) 1(66.168,66.246) 1(66.168,83.869) 1(66.168,101.493) 1(66.168,119.116) 1(66.168,136.74) 1(83.766,13.375) 1(83.766,30.999) 1(83.766,48.622) 1(83.766,66.246) 1(83.766,83.869) 1(83.766,101.493) 1(83.766,119.116) 1(83.766,136.74) 1(101.365,13.375) 1(101.365,30.999) 1(101.365,48.622) 1(101.365,66.246) 1(101.365,83.869) 1(101.365,101.493) 1(101.365,119.116) 1(101.365,136.74) 1(118.963,13.375) 1(118.963,30.999) 1(118.963,48.622) 1(118.963,66.246) 1(118.963,83.869) 1(118.963,101.493) 1(118.963,119.116) 1(118.963,136.74) 1(136.562,13.375) 1(136.562,30.999) 1(136.562,48.622) 1(136.562,66.246) 1(136.562,83.869) 1(136.562,101.493) 1(136.562,119.116) 1(136.562,136.74)
  round 2.235 all layers, no hole: 5(2.5,148) 5(67,2) 5(85.5,2) 5(147.5,148)

## Via types
v1: diameter 1.27, hole 0.711, Top Layer to Bottom Layer, 4 vias

## Nets (pads, with @x,y where several pads share a name; then routed paths per layer and width w, separated by ;. In a path a pad name is that pad's centre, name@x,y a point inside that pad or via, vN(x,y) a via of type N, cw(c..) or ccw(c..) an arc to the next point about the centre after c; other vN are vias at no path point)
GND: J1.2 pad.5@67,2 pad.5@85.5,2 | length 344.6
  Layer 1 w0.254: pad.5@67,2 70.555,2 77.083,2.007 pad.5@85.5,2
  Layer 2 w0.254: pad.5@67,2 64.834,4.166 6.586,4.166 4.064,6.688 4.064,89.408 5.08,90.424 136.855,90.424 139.393,87.886 139.393,78.082 146.177,71.298 148.387,71.298 148.717,71.628 148.717,75.692 148.031,76.378 146.99,76.378 145.466,77.902 145.466,86.919 146.304,87.757 J1.2
Sens_Col_0: J1.3 S1.1 S2.1 S3.1 S4.1 S5.1 S6.1 S7.1 S8.1 S9.1 S10.1 S11.1 S12.1 S13.1 S14.1 S15.1 S16.1 | length 201.3
  Layer 2 w0.254: S1.1 5.753,140.437 13.361,140.437 S2.1 14.553,140.437 22.161,140.437 S3.1 23.353,140.437 30.961,140.437 S4.1 32.153,140.437 39.761,140.437 S5.1 40.953,140.437 48.561,140.437 S6.1 49.753,140.437 57.361,140.437 S7.1 58.553,140.437 66.161,140.437 S8.1 67.353,140.437 74.961,140.437 S9.1 76.153,140.437 83.761,140.437 S10.1 84.953,140.437 92.561,140.437 S11.1 93.753,140.437 101.361,140.437 S12.1 102.553,140.437 110.161,140.437 S13.1 111.353,140.437 118.961,140.437 S14.1 120.153,140.437 127.761,140.437 S15.1 128.953,140.437 136.561,140.437 S16.1 149.214,128.976 149.214,86.36 148.897,86.043 148.326,86.043 J1.3
Sens_Col_1: J1.4 S17.1 S18.1 S19.1 S20.1 S21.1 S22.1 S23.1 S24.1 S25.1 S26.1 S27.1 S28.1 S29.1 S30.1 S31.1 S32.1 | length 198.8
  Layer 2 w0.254: S17.1 5.741,131.648 13.373,131.648 S18.1 14.541,131.648 22.173,131.648 S19.1 23.341,131.648 30.973,131.648 S20.1 32.141,131.648 39.773,131.648 S21.1 40.941,131.648 48.573,131.648 S22.1 49.741,131.648 57.373,131.648 S23.1 58.541,131.648 66.173,131.648 S24.1 67.341,131.648 74.973,131.648 S25.1 76.141,131.648 83.773,131.648 S26.1 84.941,131.648 92.573,131.648 S27.1 93.741,131.648 101.373,131.648 S28.1 102.541,131.648 110.173,131.648 S29.1 111.341,131.648 118.973,131.648 S30.1 120.141,131.648 127.773,131.648 S31.1 128.941,131.648 136.573,131.648 S32.1 142.24,127.149 142.24,89.979 143.256,88.963 148.135,88.963 148.706,88.392 148.706,86.868 148.389,86.551 146.952,86.551 146.279,85.877 146.279,83.898 J1.4
Sens_Col_2: J1.5 S33.1 S34.1 S35.1 S36.1 S37.1 S38.1 S39.1 S40.1 S41.1 S42.1 S43.1 S44.1 S45.1 S46.1 S47.1 S48.1 | length 239.9
  Layer 1 w0.254: S47.1 127.762,124.026 127.762,141.554 129.032,142.824 145.161,142.824 146.279,141.707 146.279,81.358 J1.5
  Layer 2 w0.254: S33.1 5.855,122.733 13.259,122.733 S34.1 14.554,122.834 22.16,122.834 S35.1 23.455,122.733 30.859,122.733 S36.1 32.154,122.834 39.76,122.834 S37.1 40.953,122.834 48.56,122.834 S38.1 49.855,122.733 57.259,122.733 S39.1 58.655,122.733 66.059,122.733 S40.1 67.455,122.733 74.859,122.733 S41.1 76.255,122.733 83.659,122.733 S42.1 84.953,122.834 92.56,122.834 S43.1 93.753,122.834 101.36,122.834 S44.1 102.553,122.834 110.16,122.834 S45.1 111.353,122.834 118.96,122.834 S46.1 120.153,122.834 127.76,122.834 S47.1 128.953,122.834 136.56,122.834 S48.1
Sens_Col_3: J1.6 S49.1 S50.1 S51.1 S52.1 S53.1 S54.1 S55.1 S56.1 S57.1 S58.1 S59.1 S60.1 S61.1 S62.1 S63.1 S64.1 | length 259.7
  Layer 1 w0.254: S62.1 123.368,118.441 123.368,142.342 124.968,143.942 145.161,143.942 148.717,140.386 148.717,78.814 J1.6
  Layer 2 w0.254: S49.1 5.843,113.944 13.271,113.944 S50.1 14.643,113.944 22.071,113.944 S51.1 23.443,113.944 30.871,113.944 S52.1 32.243,113.944 39.671,113.944 S53.1 40.941,114.046 48.573,114.046 S54.1 49.741,114.046 57.373,114.046 S55.1 58.541,114.046 66.173,114.046 S56.1 67.341,114.046 74.973,114.046 S57.1 76.141,114.046 83.773,114.046 S58.1 84.941,114.046 92.573,114.046 S59.1 93.741,114.046 101.373,114.046 S60.1 102.541,114.046 110.173,114.046 S61.1 111.341,114.046 118.973,114.046 S62.1 120.141,114.046 127.773,114.046 S63.1 128.941,114.046 136.573,114.046 S64.1
Sens_Col_4: J1.7 S65.1 S66.1 S67.1 S68.1 S69.1 S70.1 S71.1 S72.1 S73.1 S74.1 S75.1 S76.1 S77.1 S78.1 S79.1 S80.1 | length 175.1
  Layer 2 w0.254: S65.1 5.754,105.232 13.36,105.232 S66.1 14.554,105.232 22.16,105.232 S67.1 23.354,105.232 30.96,105.232 S68.1 32.255,105.131 39.658,105.131 S69.1 41.055,105.131 48.459,105.131 S70.1 49.754,105.232 57.36,105.232 S71.1 58.655,105.131 66.059,105.131 S72.1 67.455,105.131 74.859,105.131 S73.1 76.255,105.131 83.658,105.131 S74.1 85.055,105.131 92.459,105.131 S75.1 93.855,105.131 101.259,105.131 S76.1 102.554,105.232 110.16,105.232 S77.1 111.354,105.232 118.96,105.232 S78.1 120.154,105.232 127.76,105.232 S79.1 128.954,105.232 136.56,105.232 S80.1 140.409,102.577 140.409,82.148 J1.7
Sens_Col_5: J1.8 S81.1 S82.1 S83.1 S84.1 S85.1 S86.1 S87.1 S88.1 S89.1 S90.1 S91.1 S92.1 S93.1 S94.1 S95.1 S96.1 | length 168.5
  Layer 2 w0.254: S81.1 5.741,96.444 13.373,96.444 S82.1 14.541,96.444 22.173,96.444 S83.1 23.341,96.444 30.973,96.444 S84.1 32.141,96.444 39.773,96.444 S85.1 40.941,96.444 48.573,96.444 S86.1 49.741,96.444 57.373,96.444 S87.1 58.541,96.444 66.173,96.444 S88.1 67.341,96.444 74.973,96.444 S89.1 76.243,96.342 83.671,96.342 S90.1 85.043,96.342 92.471,96.342 S91.1 93.843,96.342 101.271,96.342 S92.1 102.541,96.444 110.173,96.444 S93.1 111.341,96.444 118.973,96.444 S94.1 120.243,96.342 127.671,96.342 S95.1 129.043,96.342 136.471,96.342 S96.1 139.901,94.284 139.901,80.116 J1.8
Sens_Col_6: J1.9 S97.1 S98.1 S99.1 S100.1 S101.1 S102.1 S103.1 S104.1 S105.1 S106.1 S107.1 S108.1 S109.1 S110.1 S111.1 S112.1 | length 169.2
  Layer 2 w0.254: S97.1 5.856,87.528 13.259,87.528 S98.1 14.554,87.63 22.16,87.63 S99.1 23.354,87.63 30.96,87.63 S100.1 32.154,87.63 39.76,87.63 S101.1 40.954,87.63 48.56,87.63 S102.1 49.754,87.63 57.36,87.63 S103.1 58.554,87.63 66.16,87.63 S104.1 67.354,87.63 74.96,87.63 S105.1 76.154,87.63 83.76,87.63 S106.1 84.954,87.63 92.56,87.63 S107.1 93.754,87.63 101.36,87.63 S108.1 102.554,87.63 110.16,87.63 S109.1 111.353,87.63 118.96,87.63 S110.1 120.154,87.63 127.76,87.63 S111.1 128.954,87.63 ; S112.1 136.56,87.63 128.954,87.63 ; J1.9 141.154,69.977 137.795,73.336 137.795,79.946 136.384,81.356 135.227,81.356 128.954,87.63
Sens_Col_7: J1.10 S113.1 S114.1 S115.1 S116.1 S117.1 S118.1 S119.1 S120.1 S121.1 S122.1 S123.1 S124.1 S125.1 S126.1 S127.1 S128.1 | length 161.8
  Layer 2 w0.254: S113.1 5.843,78.74 13.271,78.74 S114.1 14.541,78.842 22.173,78.842 S115.1 23.341,78.842 30.973,78.842 S116.1 32.141,78.842 39.773,78.842 S117.1 40.941,78.842 48.573,78.842 S118.1 49.741,78.842 57.373,78.842 S119.1 58.541,78.842 66.173,78.842 S120.1 67.341,78.842 74.973,78.842 S121.1 76.141,78.842 83.773,78.842 S122.1 84.941,78.842 92.573,78.842 S123.1 93.741,78.842 101.373,78.842 S124.1 102.541,78.842 110.173,78.842 S125.1 111.341,78.842 118.973,78.842 S126.1 120.141,78.842 127.773,78.842 S127.1 129.178,79.426 129.762,78.842 ; S128.1 136.573,78.842 129.762,78.842 ; J1.10 141.167,67.437 129.762,78.842
Sens_Col_8: J1.11 S129.1 S130.1 S131.1 S132.1 S133.1 S134.1 S135.1 S136.1 S137.1 S138.1 S139.1 S140.1 S141.1 S142.1 S143.1 S144.1 | length 152.1
  Layer 2 w0.254: S129.1 5.754,70.028 13.36,70.028 S130.1 14.554,70.028 22.16,70.028 S131.1 23.354,70.028 30.96,70.028 S132.1 32.154,70.028 39.76,70.028 S133.1 40.954,70.028 48.56,70.028 S134.1 49.754,70.028 57.36,70.028 S135.1 58.554,70.028 66.16,70.028 S136.1 67.354,70.028 74.96,70.028 S137.1 76.154,70.028 83.76,70.028 S138.1 84.954,70.028 92.56,70.028 S139.1 93.754,70.028 101.36,70.028 S140.1 102.554,70.028 110.16,70.028 S141.1 111.354,70.028 118.96,70.028 S142.1 120.154,70.028 127.76,70.028 S143.1 128.954,70.028 136.56,70.028 S144.1 142.885,64.897 J1.11
Sens_Col_9: J1.12 S145.1 S146.1 S147.1 S148.1 S149.1 S150.1 S151.1 S152.1 S153.1 S154.1 S155.1 S156.1 S157.1 S158.1 S159.1 S160.1 | length 150.9
  Layer 2 w0.254: S145.1 5.742,61.239 13.372,61.239 S146.1 14.643,61.138 22.071,61.138 S147.1 23.443,61.138 30.871,61.138 S148.1 32.243,61.138 39.671,61.138 S149.1 41.043,61.138 48.471,61.138 S150.1 49.843,61.138 57.271,61.138 S151.1 58.542,61.239 66.172,61.239 S152.1 67.342,61.239 74.972,61.239 S153.1 76.142,61.239 83.772,61.239 S154.1 85.043,61.138 92.471,61.138 S155.1 93.843,61.138 101.271,61.138 S156.1 102.542,61.239 110.172,61.239 S157.1 111.342,61.239 118.972,61.239 S158.1 120.142,61.239 127.772,61.239 S159.1 128.942,61.239 136.572,61.239 S160.1 138.286,62.953 146.904,62.953 J1.12
Sens_Col_10: J1.13 S161.1 S162.1 S163.1 S164.1 S165.1 S166.1 S167.1 S168.1 S169.1 S170.1 S171.1 S172.1 S173.1 S174.1 S175.1 S176.1 | length 159.2
  Layer 2 w0.254: S161.1 5.856,52.324 13.258,52.324 S162.1 14.656,52.324 22.058,52.324 S163.1 23.354,52.426 30.96,52.426 S164.1 32.256,52.324 39.658,52.324 S165.1 41.056,52.324 48.458,52.324 S166.1 49.856,52.324 57.258,52.324 S167.1 58.555,52.426 66.159,52.426 S168.1 67.456,52.324 74.858,52.324 S169.1 76.256,52.324 83.658,52.324 S170.1 84.954,52.426 92.559,52.426 S171.1 93.754,52.426 101.359,52.426 S172.1 102.554,52.426 110.159,52.426 S173.1 111.354,52.426 118.959,52.426 S174.1 120.154,52.426 127.759,52.426 S175.1 128.954,52.426 136.559,52.426 S176.1 138.128,52.052 144.94,52.052 146.304,53.416 148.336,53.416 148.717,53.797 148.717,58.6 J1.13
Sens_Col_11: J1.14 S177.1 S178.1 S179.1 S180.1 S181.1 S182.1 S183.1 S184.1 S185.1 S186.1 S187.1 S188.1 S189.1 S190.1 S191.1 S192.1 | length 310.8
  Layer 2 w0.254: S192.1 136.572,43.637 128.942,43.637 S191.1 127.772,43.637 120.142,43.637 S190.1 118.972,43.637 111.342,43.637 S189.1 110.172,43.637 102.542,43.637 S188.1 101.372,43.637 93.742,43.637 S187.1 92.572,43.637 84.942,43.637 S186.1 83.772,43.637 76.142,43.637 S185.1 74.972,43.637 67.342,43.637 S184.1 66.07,43.536 58.644,43.536 S183.1 57.372,43.637 49.742,43.637 S182.1 48.572,43.637 40.942,43.637 S181.1 39.67,43.536 32.244,43.536 S180.1 30.87,43.536 23.443,43.536 S179.1 22.172,43.637 14.542,43.637 S178.1 13.372,43.637 5.742,43.637 S177.1 4.572,44.807 4.572,62.128 6.096,63.652 148.057,63.652 148.717,62.992 148.717,61.468 148.336,61.087 146.812,61.087 146.279,60.554 146.279,58.498 J1.14
Sens_Col_12: J1.15 S193.1 S194.1 S195.1 S196.1 S197.1 S198.1 S199.1 S200.1 S201.1 S202.1 S203.1 S204.1 S205.1 S206.1 S207.1 S208.1 | length 163.4
  Layer 1 w0.254: S208.1 141.707,39.971 141.707,48.944 J1.15
  Layer 2 w0.254: S193.1 5.856,34.722 13.258,34.722 S194.1 14.656,34.722 22.058,34.722 S195.1 23.355,34.823 30.959,34.823 S196.1 32.256,34.722 39.658,34.722 S197.1 41.056,34.722 48.458,34.722 S198.1 49.755,34.823 57.359,34.823 S199.1 58.555,34.823 66.159,34.823 S200.1 67.355,34.823 74.959,34.823 S201.1 76.155,34.823 83.759,34.823 S202.1 84.955,34.823 92.559,34.823 S203.1 93.755,34.823 101.359,34.823 S204.1 102.555,34.823 110.159,34.823 S205.1 111.355,34.823 118.959,34.823 S206.1 120.155,34.823 127.759,34.823 S207.1 128.955,34.823 136.559,34.823 S208.1
Sens_Col_13: J1.16 S209.1 S210.1 S211.1 S212.1 S213.1 S214.1 S215.1 S216.1 S217.1 S218.1 S219.1 S220.1 S221.1 S222.1 S223.1 S224.1 | length 170
  Layer 1 w0.254: S224.1 143.205,32.668 143.205,48.901 146.501,52.197 J1.16
  Layer 2 w0.254: S209.1 5.844,25.933 13.27,25.933 S210.1 14.542,26.035 22.172,26.035 S211.1 23.444,25.933 30.87,25.933 S212.1 32.142,26.035 39.772,26.035 S213.1 40.942,26.035 48.572,26.035 S214.1 49.742,26.035 57.372,26.035 S215.1 58.542,26.035 66.172,26.035 S216.1 67.342,26.035 74.972,26.035 S217.1 76.142,26.035 83.772,26.035 S218.1 84.942,26.035 92.572,26.035 S219.1 93.742,26.035 101.372,26.035 S220.1 102.542,26.035 110.172,26.035 S221.1 111.342,26.035 118.972,26.035 S222.1 120.142,26.035 127.772,26.035 S223.1 129.044,25.933 136.47,25.933 S224.1
Sens_Col_14: J1.17 S225.1 S226.1 S227.1 S228.1 S229.1 S230.1 S231.1 S232.1 S233.1 S234.1 S235.1 S236.1 S237.1 S238.1 S239.1 S240.1 | length 260.1
  Layer 1 w0.254: S234.1 86.792,15.384 86.792,8.484 89.764,5.512 130.226,5.512 131.013,4.724 147.93,4.724 149.225,6.02 149.225,49.646 J1.17
  Layer 2 w0.254: S225.1 5.755,17.221 13.359,17.221 S226.1 14.656,17.12 22.057,17.12 S227.1 23.456,17.12 30.858,17.12 S228.1 32.256,17.12 39.658,17.12 S229.1 41.056,17.12 48.457,17.12 S230.1 49.857,17.12 57.257,17.12 S231.1 58.555,17.221 66.159,17.221 S232.1 67.355,17.221 74.959,17.221 S233.1 76.155,17.221 83.759,17.221 S234.1 84.955,17.221 92.559,17.221 S235.1 93.755,17.221 101.359,17.221 S236.1 102.555,17.221 110.159,17.221 S237.1 111.355,17.221 118.959,17.221 S238.1 120.155,17.221 127.759,17.221 S239.1 128.955,17.221 136.559,17.221 S240.1
Sens_Col_15: J1.18 S241.1 S242.1 S243.1 S244.1 S245.1 S246.1 S247.1 S248.1 S249.1 S250.1 S251.1 S252.1 S253.1 S254.1 S255.1 S256.1 | length 190
  Layer 1 w0.254: S251.1 94.046,8.128 101.067,8.128 S252.1 ; S256.1 137.738,8.436 145.034,8.436 145.316,8.718 145.316,44.933 J1.18
  Layer 2 w0.254: S241.1 5.843,8.331 13.271,8.331 S242.1 14.643,8.331 22.071,8.331 S243.1 23.443,8.331 30.871,8.331 S244.1 32.243,8.331 39.671,8.331 S245.1 41.043,8.331 48.471,8.331 S246.1 49.843,8.331 57.271,8.331 S247.1 58.643,8.331 66.071,8.331 S248.1 67.443,8.331 74.871,8.331 S249.1 76.243,8.331 83.671,8.331 S250.1 85.043,8.331 92.471,8.331 S251.1 ; S252.1 102.643,8.331 110.071,8.331 S253.1 111.846,7.929 118.872,7.929 119.557,8.613 S254.1 120.646,7.929 128.254,7.929 128.254,8.914 S255.1 129.043,8.331 136.471,8.331 S256.1
Sens_Row_0: J1.19 S16.2 S32.2 S48.2 S64.2 S80.2 S96.2 S112.2 S128.2 S144.2 S160.2 S176.2 S192.2 S208.2 S224.2 S240.2 S256.2 | length 144.3
  Layer 1 w0.254: S256.2 144.713,9.039 144.735,10.128 S240.2 S224.2 S208.2 S192.2 144.735,48.793 146.869,50.927 148.336,50.927 148.717,51.308 148.717,55.372 148.082,56.007 145.288,56.007 144.735,56.56 ; S176.2 144.735,56.56 ; S16.2 S32.2 S48.2 S64.2 S80.2 S96.2 S112.2 S128.2 S144.2 S160.2 144.735,57.404 144.735,56.56
  Layer 2 w0.254: S192.2 145.09,44.577 J1.19
Sens_Row_1: J1.20 S15.2 S31.2 S47.2 S63.2 S79.2 S95.2 S111.2 S127.2 S143.2 S159.2 S175.2 S191.2 S207.2 S223.2 S239.2 S255.2 | length 178.6
  Layer 1 w0.254: S255.2 133.706,11.247 133.706,15.59 S239.2 S223.2 133.706,28.849 133.706,33.192 S207.2 S191.2 133.706,46.451 133.706,50.794 S175.2 S159.2 133.706,64.053 133.706,68.396 S143.2 S127.2 133.706,81.655 133.706,85.997 S111.2 S95.2 133.706,99.257 133.706,103.6 S79.2 S63.2 133.706,116.859 133.706,121.202 S47.2 S31.2 133.706,134.461 133.706,138.804 S15.2
  Layer 2 w0.254: S239.2 140.056,21.94 140.056,39.421 142.672,42.037 J1.20
Sens_Row_2: J1.21 S14.2 S30.2 S46.2 S62.2 S78.2 S94.2 S110.2 S126.2 S142.2 S158.2 S174.2 S190.2 S206.2 S222.2 S238.2 S254.2 | length 177.7
  Layer 1 w0.254: S254.2 S238.2 S222.2 S206.2 S190.2 S174.2 S158.2 S142.2 S126.2 S110.2 S94.2 S78.2 S62.2 S46.2 S30.2 S14.2
  Layer 2 w0.254: S254.2 127.135,9.733 128.943,11.542 140.574,11.542 142.265,13.233 142.265,34.262 J1.21
Sens_Row_3: J1.22 S13.2 S29.2 S45.2 S61.2 S77.2 S93.2 S109.2 S125.2 S141.2 S157.2 S173.2 S189.2 S205.2 S221.2 S237.2 S253.2 | length 205.2
  Layer 1 w0.254: S253.2 116.129,11.224 116.129,15.613 S237.2 S221.2 116.129,28.826 116.129,33.215 S205.2 S189.2 116.129,46.428 116.129,50.817 S173.2 S157.2 116.129,64.03 116.129,68.419 S141.2 S125.2 116.129,81.632 116.129,86.02 S109.2 S93.2 116.129,99.234 116.129,103.623 S77.2 S61.2 116.129,116.836 116.129,121.225 S45.2 S29.2 116.129,134.438 116.129,138.827 S13.2
  Layer 2 w0.254: S253.2 118.335,9.906 118.611,10.182 123.644,10.182 129.769,16.307 136.804,16.307 141.046,20.549 141.046,38.619 143.194,40.767 148.082,40.767 148.717,40.132 148.717,38.174 J1.22
Sens_Row_4: J1.23 S12.2 S28.2 S44.2 S60.2 S76.2 S92.2 S108.2 S124.2 S140.2 S156.2 S172.2 S188.2 S204.2 S220.2 S236.2 S252.2 | length 195.9
  Layer 1 w0.254: S12.2 S28.2 S44.2 S60.2 S76.2 S92.2 S108.2 S124.2 S140.2 S156.2 S172.2 S188.2 S204.2 S220.2 S236.2 S252.2 110.894,7.658 145.047,7.658 146.294,8.905 146.294,33.211 J1.23
Sens_Row_5: J1.24 S11.2 S27.2 S43.2 S59.2 S75.2 S91.2 S107.2 S123.2 S139.2 S155.2 S171.2 S187.2 S203.2 S219.2 S235.2 S251.2 | length 216.6
  Layer 1 w0.254: S251.2 98.527,11.226 98.527,15.611 S235.2 S219.2 98.527,28.828 98.527,33.213 S203.2 S187.2 98.527,46.43 98.527,50.815 S171.2 S155.2 98.527,64.033 98.527,68.417 S139.2 S123.2 98.527,81.634 98.527,86.018 S107.2 S91.2 98.527,99.236 98.527,103.621 S75.2 S59.2 98.527,116.838 98.527,121.223 S43.2 S27.2 98.527,134.44 98.527,138.825 S11.2
  Layer 2 w0.254: S251.2 101.319,9.601 116.691,9.601 117.856,8.437 118.618,8.437 118.923,8.741 118.923,9.601 124.616,9.601 125.781,8.437 127.737,8.437 127.737,9.319 128.016,9.599 140.332,9.599 142.977,12.243 142.977,30.582 144.272,31.877 J1.24
Sens_Row_6: J1.25 S10.2 S26.2 S42.2 S58.2 S74.2 S90.2 S106.2 S122.2 S138.2 S154.2 S170.2 S186.2 S202.2 S218.2 S234.2 S250.2 | length 211.8
  Layer 1 w0.254: S250.2 S234.2 S218.2 S202.2 S186.2 S170.2 S154.2 S138.2 S122.2 S106.2 S90.2 S74.2 S58.2 S42.2 S26.2 S10.2 ; v1(145.796,48.387) 148.336,48.387 148.706,48.017 148.706,30.543 J1.25
  Layer 2 w0.254: S186.2 98.513,50.8 143.383,50.8 v1(145.796,48.387)
Sens_Row_7: J1.26 S9.2 S25.2 S41.2 S57.2 S73.2 S89.2 S105.2 S121.2 S137.2 S153.2 S169.2 S185.2 S201.2 S217.2 S233.2 S249.2 | length 242.5
  Layer 1 w0.254: S9.2 80.924,138.822 80.924,134.443 S25.2 S41.2 80.924,121.22 80.924,116.841 S57.2 S73.2 80.924,103.618 80.924,99.239 S89.2 S105.2 80.924,86.016 80.924,81.636 S121.2 S137.2 80.924,68.415 80.924,64.035 S153.2 S169.2 80.924,50.813 80.924,46.433 S185.2 S201.2 80.924,33.211 80.924,28.831 S217.2 S233.2 80.924,15.609 80.924,11.228 S249.2 90.095,2.057 v1(103.454,2.057)
  Layer 2 w0.254: v1(103.454,2.057) 104.927,0.584 146.99,0.584 149.225,2.819 149.225,26.077 148.505,26.797 J1.26
Sens_Row_8: J1.27 S8.2 S24.2 S40.2 S56.2 S72.2 S88.2 S104.2 S120.2 S136.2 S152.2 S168.2 S184.2 S200.2 S216.2 S232.2 S248.2 | length 224.8
  Layer 1 w0.254: S8.2 S24.2 S40.2 S56.2 S72.2 S88.2 S104.2 S120.2 S136.2 S152.2 S168.2 S184.2 S200.2 S216.2 S232.2 S248.2 78.323,5.029 84.709,5.029 88.697,1.041 124.714,1.041 v1(127.737,4.064)
  Layer 2 w0.254: v1(127.737,4.064) 137.771,4.064 143.832,10.125 143.832,21.599 146.49,24.257 J1.27
Sens_Row_9: J1.28 S7.2 S23.2 S39.2 S55.2 S71.2 S87.2 S103.2 S119.2 S135.2 S151.2 S167.2 S183.2 S199.2 S215.2 S231.2 S247.2 | length 251.3
  Layer 1 w0.254: S247.2 63.322,11.23 63.322,15.606 S231.2 S215.2 63.322,28.833 63.322,33.208 S199.2 S183.2 63.322,46.435 63.322,50.81 S167.2 S151.2 63.322,64.037 63.322,68.412 S135.2 S119.2 63.322,81.639 63.322,86.014 S103.2 S87.2 63.322,99.241 63.322,103.616 S71.2 S55.2 63.322,116.843 63.322,121.218 S39.2 S23.2 63.322,134.445 63.322,138.82 S7.2
  Layer 2 w0.254: S247.2 66.119,9.601 93.751,9.601 97.389,5.963 121.056,5.963 124.658,2.362 144.348,2.362 146.177,4.191 146.177,14.681 146.812,15.316 148.336,15.316 148.717,15.697 148.717,20.5 J1.28
Sens_Row_10: J1.29 S6.2 S22.2 S38.2 S54.2 S70.2 S86.2 S102.2 S118.2 S134.2 S150.2 S166.2 S182.2 S198.2 S214.2 S230.2 S246.2 | length 257.5
  Layer 1 w0.254: S246.2 S230.2 S214.2 S198.2 S182.2 S166.2 S150.2 S134.2 S118.2 S102.2 S86.2 S70.2 S54.2 S38.2 S22.2 S6.2
  Layer 2 w0.254: S198.2 59.719,38.405 131.318,38.405 135.484,42.57 145.618,42.57 146.304,43.256 148.133,43.256 149.225,42.164 149.225,31.496 148.387,30.658 146.812,30.658 146.279,30.124 146.279,26.06 146.812,25.527 148.071,25.527 148.706,24.892 148.706,23.357 148.336,22.987 146.812,22.987 146.294,22.469 146.294,20.383 J1.29
Sens_Row_11: J1.30 S5.2 S21.2 S37.2 S53.2 S69.2 S85.2 S101.2 S117.2 S133.2 S149.2 S165.2 S181.2 S197.2 S213.2 S229.2 S245.2 | length 260.2
  Layer 1 w0.254: S245.2 45.72,11.232 45.72,15.604 S229.2 S213.2 45.72,28.835 45.72,33.206 S197.2 S181.2 45.72,46.437 45.72,50.808 S165.2 S149.2 45.72,64.039 45.72,68.41 S133.2 S117.2 45.72,81.641 45.72,86.012 S101.2 S85.2 45.72,99.243 45.72,103.614 S69.2 S53.2 45.72,116.845 45.72,121.216 S37.2 S21.2 45.72,134.447 45.72,138.818 S5.2
  Layer 2 w0.254: S245.2 49.992,11.074 96.825,11.074 100.508,7.391 122.885,7.391 127.229,3.048 139.776,3.048 145.466,8.738 145.466,15.799 146.304,16.637 J1.30
Sens_Row_12: J1.31 S4.2 S20.2 S36.2 S52.2 S68.2 S84.2 S100.2 S116.2 S132.2 S148.2 S164.2 S180.2 S196.2 S212.2 S228.2 S244.2 | length 256.2
  Layer 1 w0.254: S4.2 S20.2 S36.2 S52.2 S68.2 S84.2 S100.2 S116.2 S132.2 S148.2 S164.2 S180.2 S196.2 S212.2 S228.2 S244.2 43.682,4.47 v1(76.962,4.47)
  Layer 2 w0.254: v1(76.962,4.47) 111.787,4.47 115.077,1.181 145.225,1.181 148.717,4.674 148.717,12.88 J1.31
Sens_Row_13: J1.32 S3.2 S19.2 S35.2 S51.2 S67.2 S83.2 S99.2 S115.2 S131.2 S147.2 S163.2 S179.2 S195.2 S211.2 S227.2 S243.2 | length 403
  Layer 1 w0.254: S243.2 28.118,11.235 28.118,15.602 S227.2 S211.2 28.118,28.837 28.118,33.204 S195.2 S179.2 28.118,46.439 28.118,50.806 S163.2 S147.2 28.118,64.041 28.118,68.408 S131.2 S115.2 28.118,81.643 28.118,86.009 S99.2 S83.2 28.118,99.245 28.118,103.612 S67.2 S51.2 28.118,116.847 28.118,121.214 S35.2 S19.2 28.118,134.449 28.118,138.816 S3.2 30.932,141.63 86.97,141.63 87.554,141.046 87.554,9.373 90.348,6.579 145.78,6.579 146.999,7.798 148.387,7.798 148.717,8.128 148.717,10.34 J1.32
Sens_Row_14: J1.33 S2.2 S18.2 S34.2 S50.2 S66.2 S82.2 S98.2 S114.2 S130.2 S146.2 S162.2 S178.2 S194.2 S210.2 S226.2 S242.2 | length 395
  Layer 1 w0.254: S242.2 S226.2 S210.2 S194.2 S178.2 S162.2 S146.2 S130.2 S114.2 S98.2 S82.2 S66.2 S50.2 S34.2 S18.2 S2.2 26.044,145.542 100.051,145.542 106.604,138.989 106.604,7.468 106.985,7.087 145.57,7.087 J1.33
Sens_Row_15: J1.34 S1.2 S17.2 S33.2 S49.2 S65.2 S81.2 S97.2 S113.2 S129.2 S145.2 S161.2 S177.2 S193.2 S209.2 S225.2 S241.2 | length 305.1
  Layer 1 w0.254: S241.2 10.516,11.236 10.516,15.6 S225.2 S209.2 10.516,28.839 10.516,33.202 S193.2 S177.2 10.516,46.442 10.516,50.804 S161.2 S145.2 10.516,64.044 10.516,68.406 S129.2 S113.2 10.516,81.646 10.516,86.008 S97.2 S81.2 10.516,99.247 10.516,103.61 S65.2 S49.2 10.516,116.849 10.516,121.212 S33.2 S17.2 10.516,134.451 10.516,138.814 S1.2
  Layer 2 w0.254: S241.2 12.151,9.601 4.826,9.601 4.572,9.347 4.572,8.128 5.74,6.96 78.207,6.96 79.807,5.359 115.165,5.359 118.836,1.689 144.463,1.689 147.5,4.727 J1.34
VIN: J1.1 pad.5@2.5,148 pad.5@147.5,148 | length 337.2
  Layer 2 w0.254: J1.1 144.145,93.652 144.145,127.559 137.516,134.188 92.634,134.188 88.138,138.684 6.045,138.684 2.5,142.229 2.5,148 5.645,148 5.664,147.98 147.5,147.98 pad.5@147.5,148
pads on no net: S1. S2. S3. S4. S5. S6. S7. S8. S9. S10. S11. S12. S13. S14. S15. S16. S17. S18. S19. S20. S21. S22. S23. S24. S25. S26. S27. S28. S29. S30. S31. S32. S33. S34. S35. S36. S37. S38. S39. S40. S41. S42. S43. S44. S45. S46. S47. S48. S49. S50. S51. S52. S53. S54. S55. S56. S57. S58. S59. S60. S61. S62. S63. S64. S65. S66. S67. S68. S69. S70. S71. S72. S73. S74. S75. S76. S77. S78. S79. S80. S81. S82. S83. S84. S85. S86. S87. S88. S89. S90. S91. S92. S93. S94. S95. S96. S97. S98. S99. S100. S101. S102. S103. S104. S105. S106. S107. S108. S109. S110. S111. S112. S113. S114. S115. S116. S117. S118. S119. S120. S121. S122. S123. S124. S125. S126. S127. S128. S129. S130. S131. S132. S133. S134. S135. S136. S137. S138. S139. S140. S141. S142. S143. S144. S145. S146. S147. S148. S149. S150. S151. S152. S153. S154. S155. S156. S157. S158. S159. S160. S161. S162. S163. S164. S165. S166. S167. S168. S169. S170. S171. S172. S173. S174. S175. S176. S177. S178. S179. S180. S181. S182. S183. S184. S185. S186. S187. S188. S189. S190. S191. S192. S193. S194. S195. S196. S197. S198. S199. S200. S201. S202. S203. S204. S205. S206. S207. S208. S209. S210. S211. S212. S213. S214. S215. S216. S217. S218. S219. S220. S221. S222. S223. S224. S225. S226. S227. S228. S229. S230. S231. S232. S233. S234. S235. S236. S237. S238. S239. S240. S241. S242. S243. S244. S245. S246. S247. S248. S249. S250. S251. S252. S253. S254. S255. S256.

## Keep-outs
Keep-Out Layer:
  the board outline again, w0.254